# Altium PCB DPT2.4.PcbDoc
Units mm, origin at the board's own origin, x right, y up, seen from the top; angles counter-clockwise.
Board outline 75 x 75 mm, 4 copper layers (Top Layer, Layer 1, Layer 2, Bottom Layer), stack 1.491 mm thick; 152 components, 40 nets, 321 pads, 351 vias.
Unrouted connection lines stored in the file: 86.
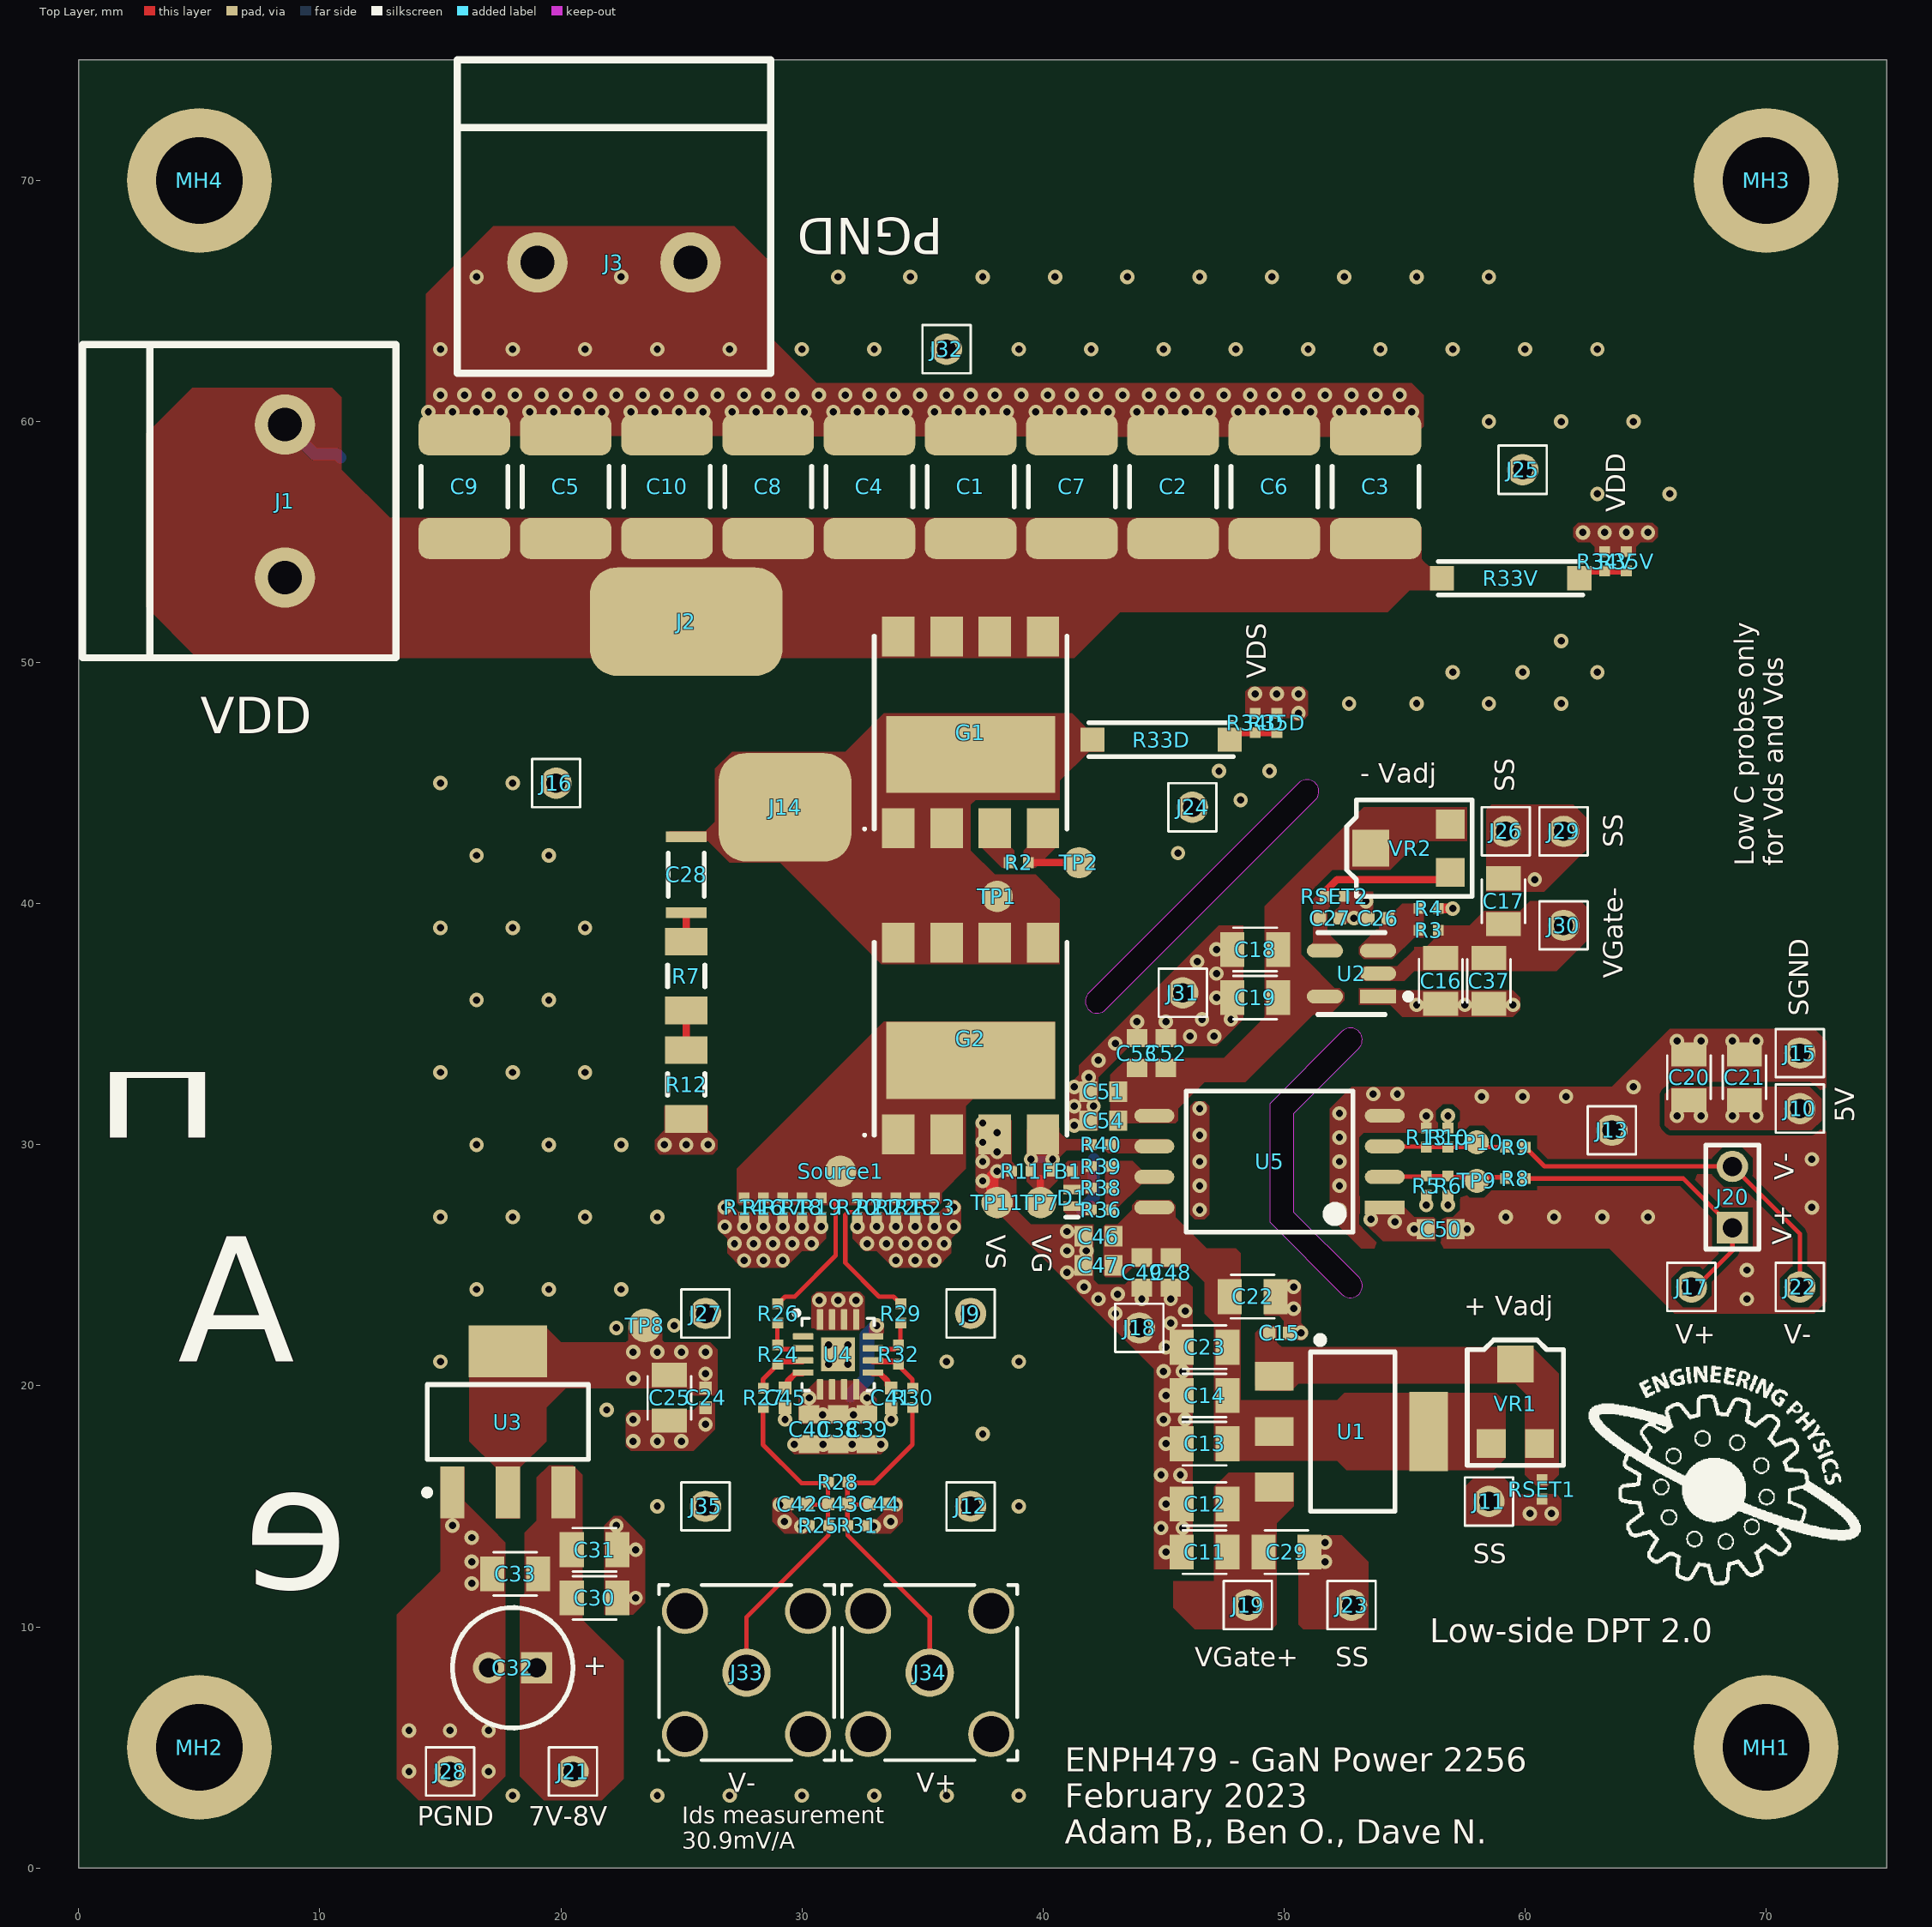
[diagram p0: Top Layer view]
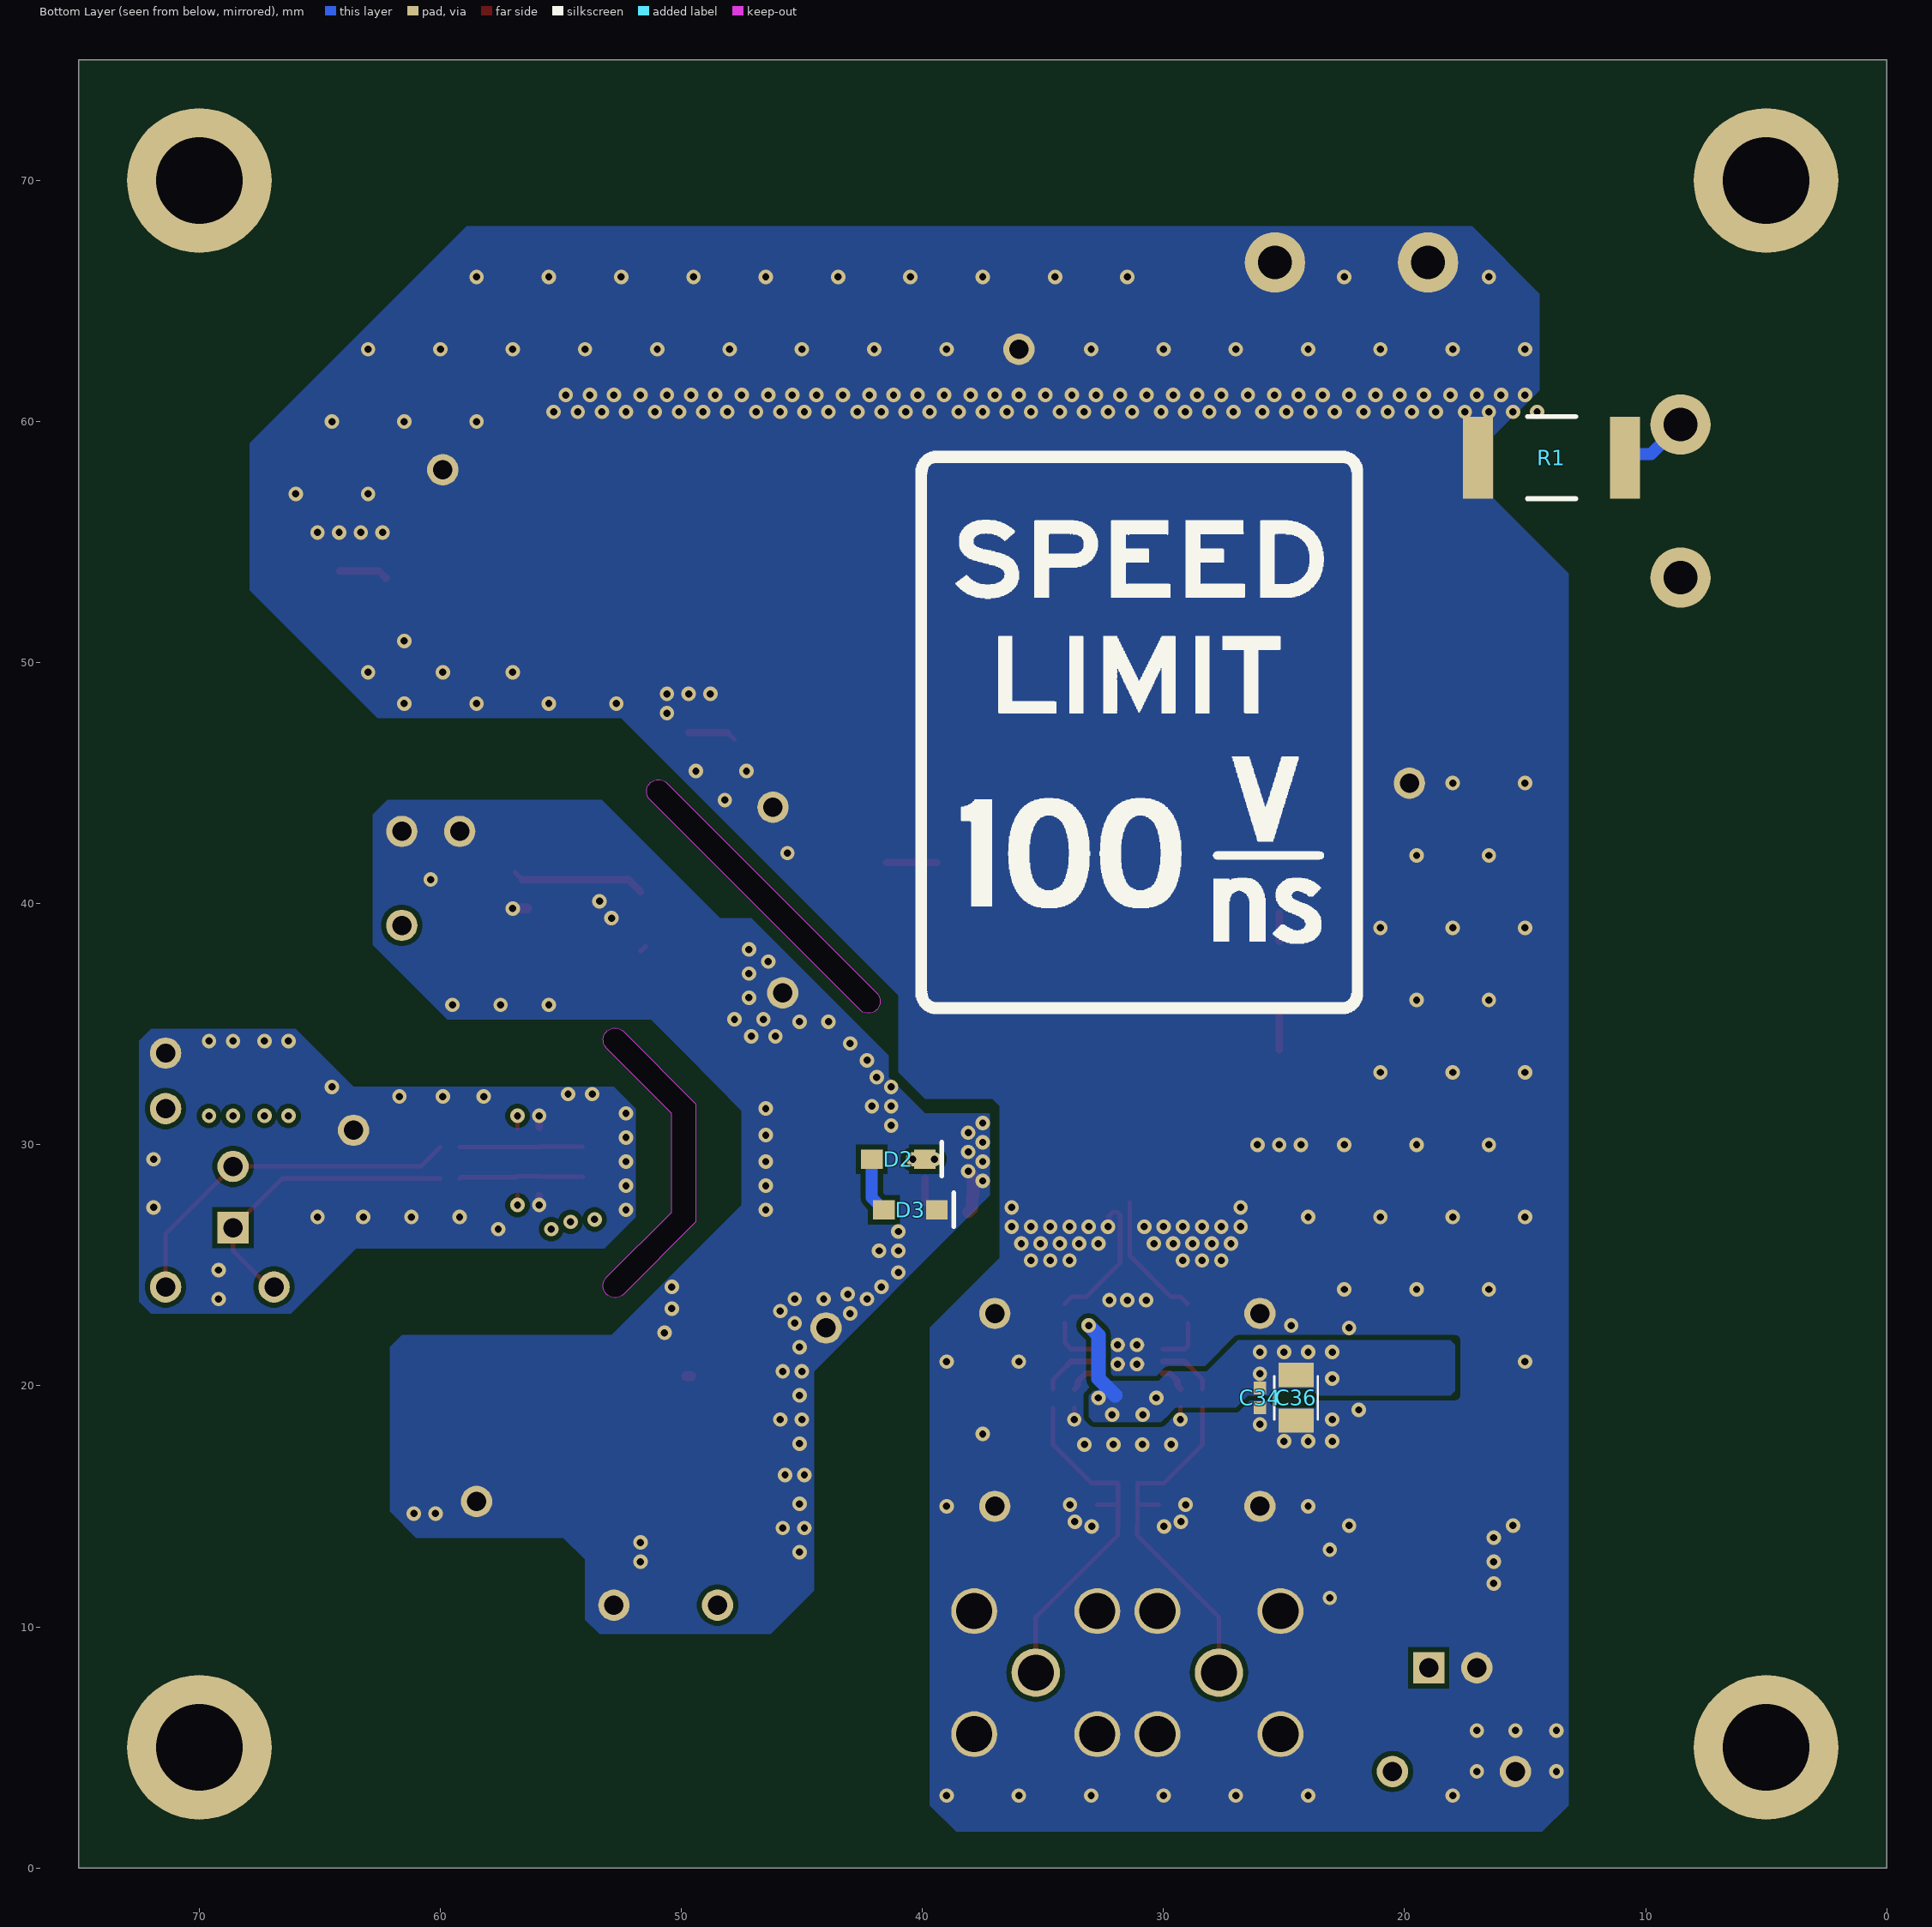
[diagram p1: Bottom Layer view, seen from below]
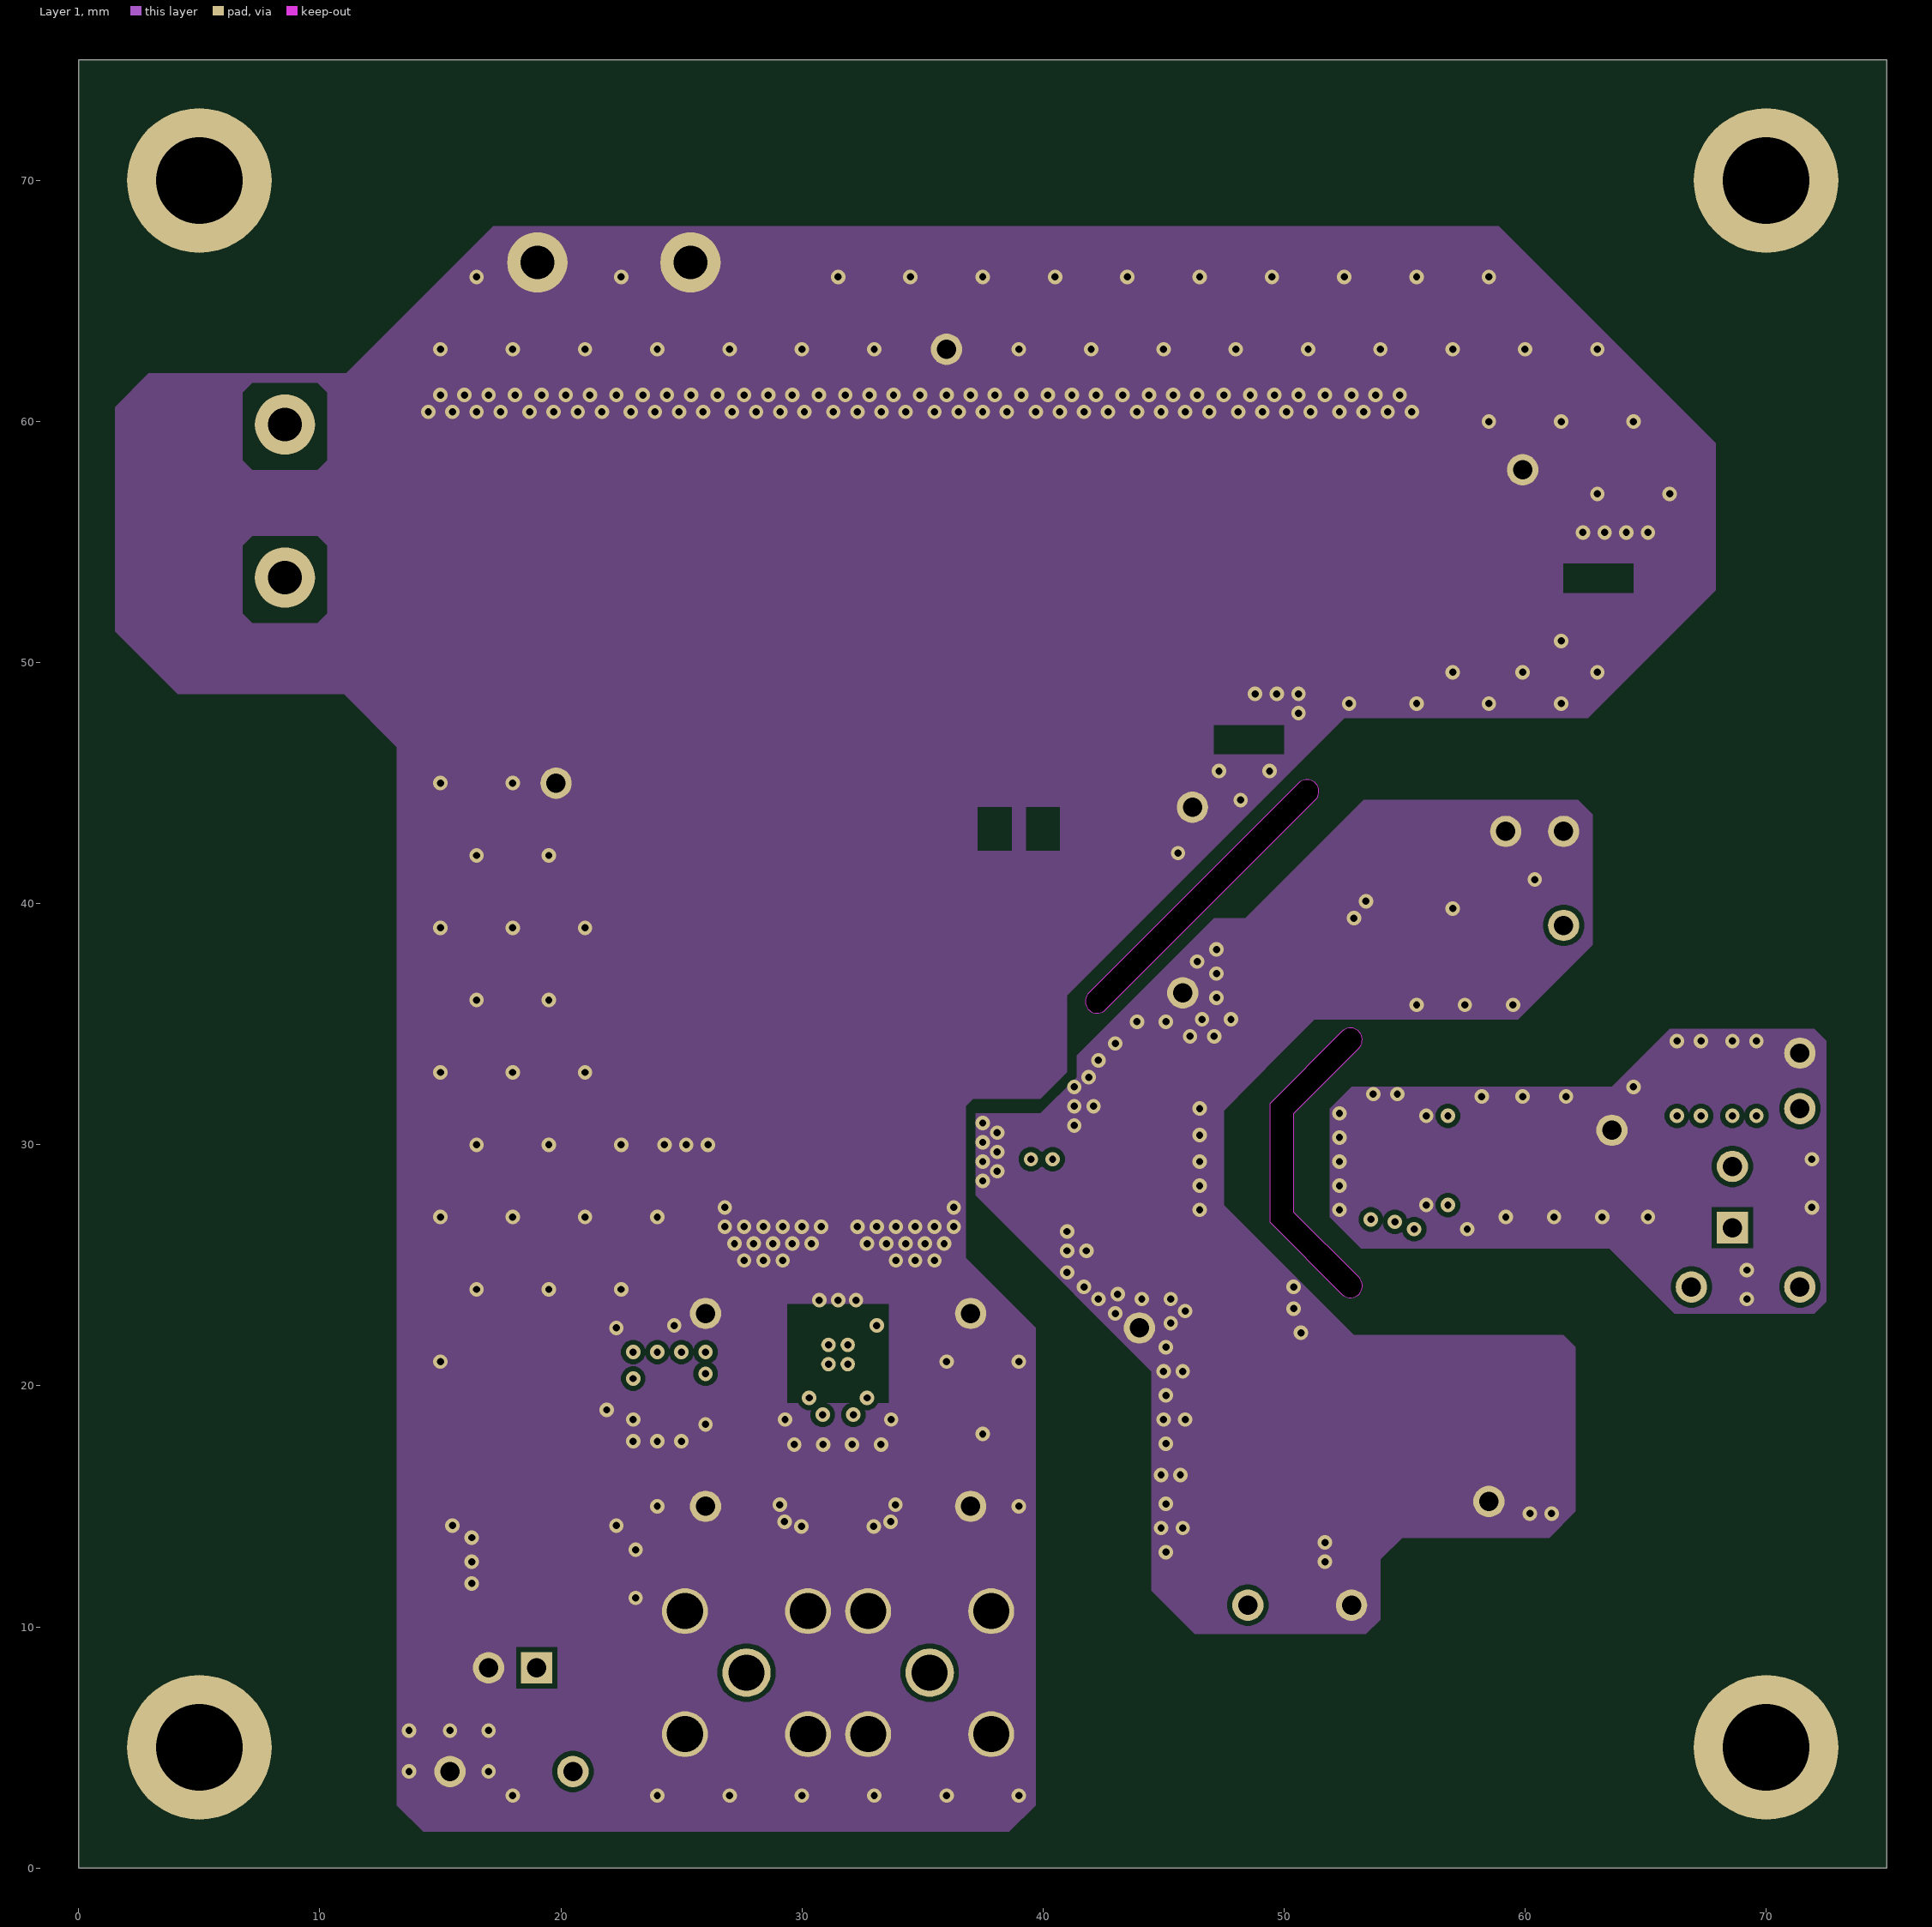
[diagram p2: Layer 1]
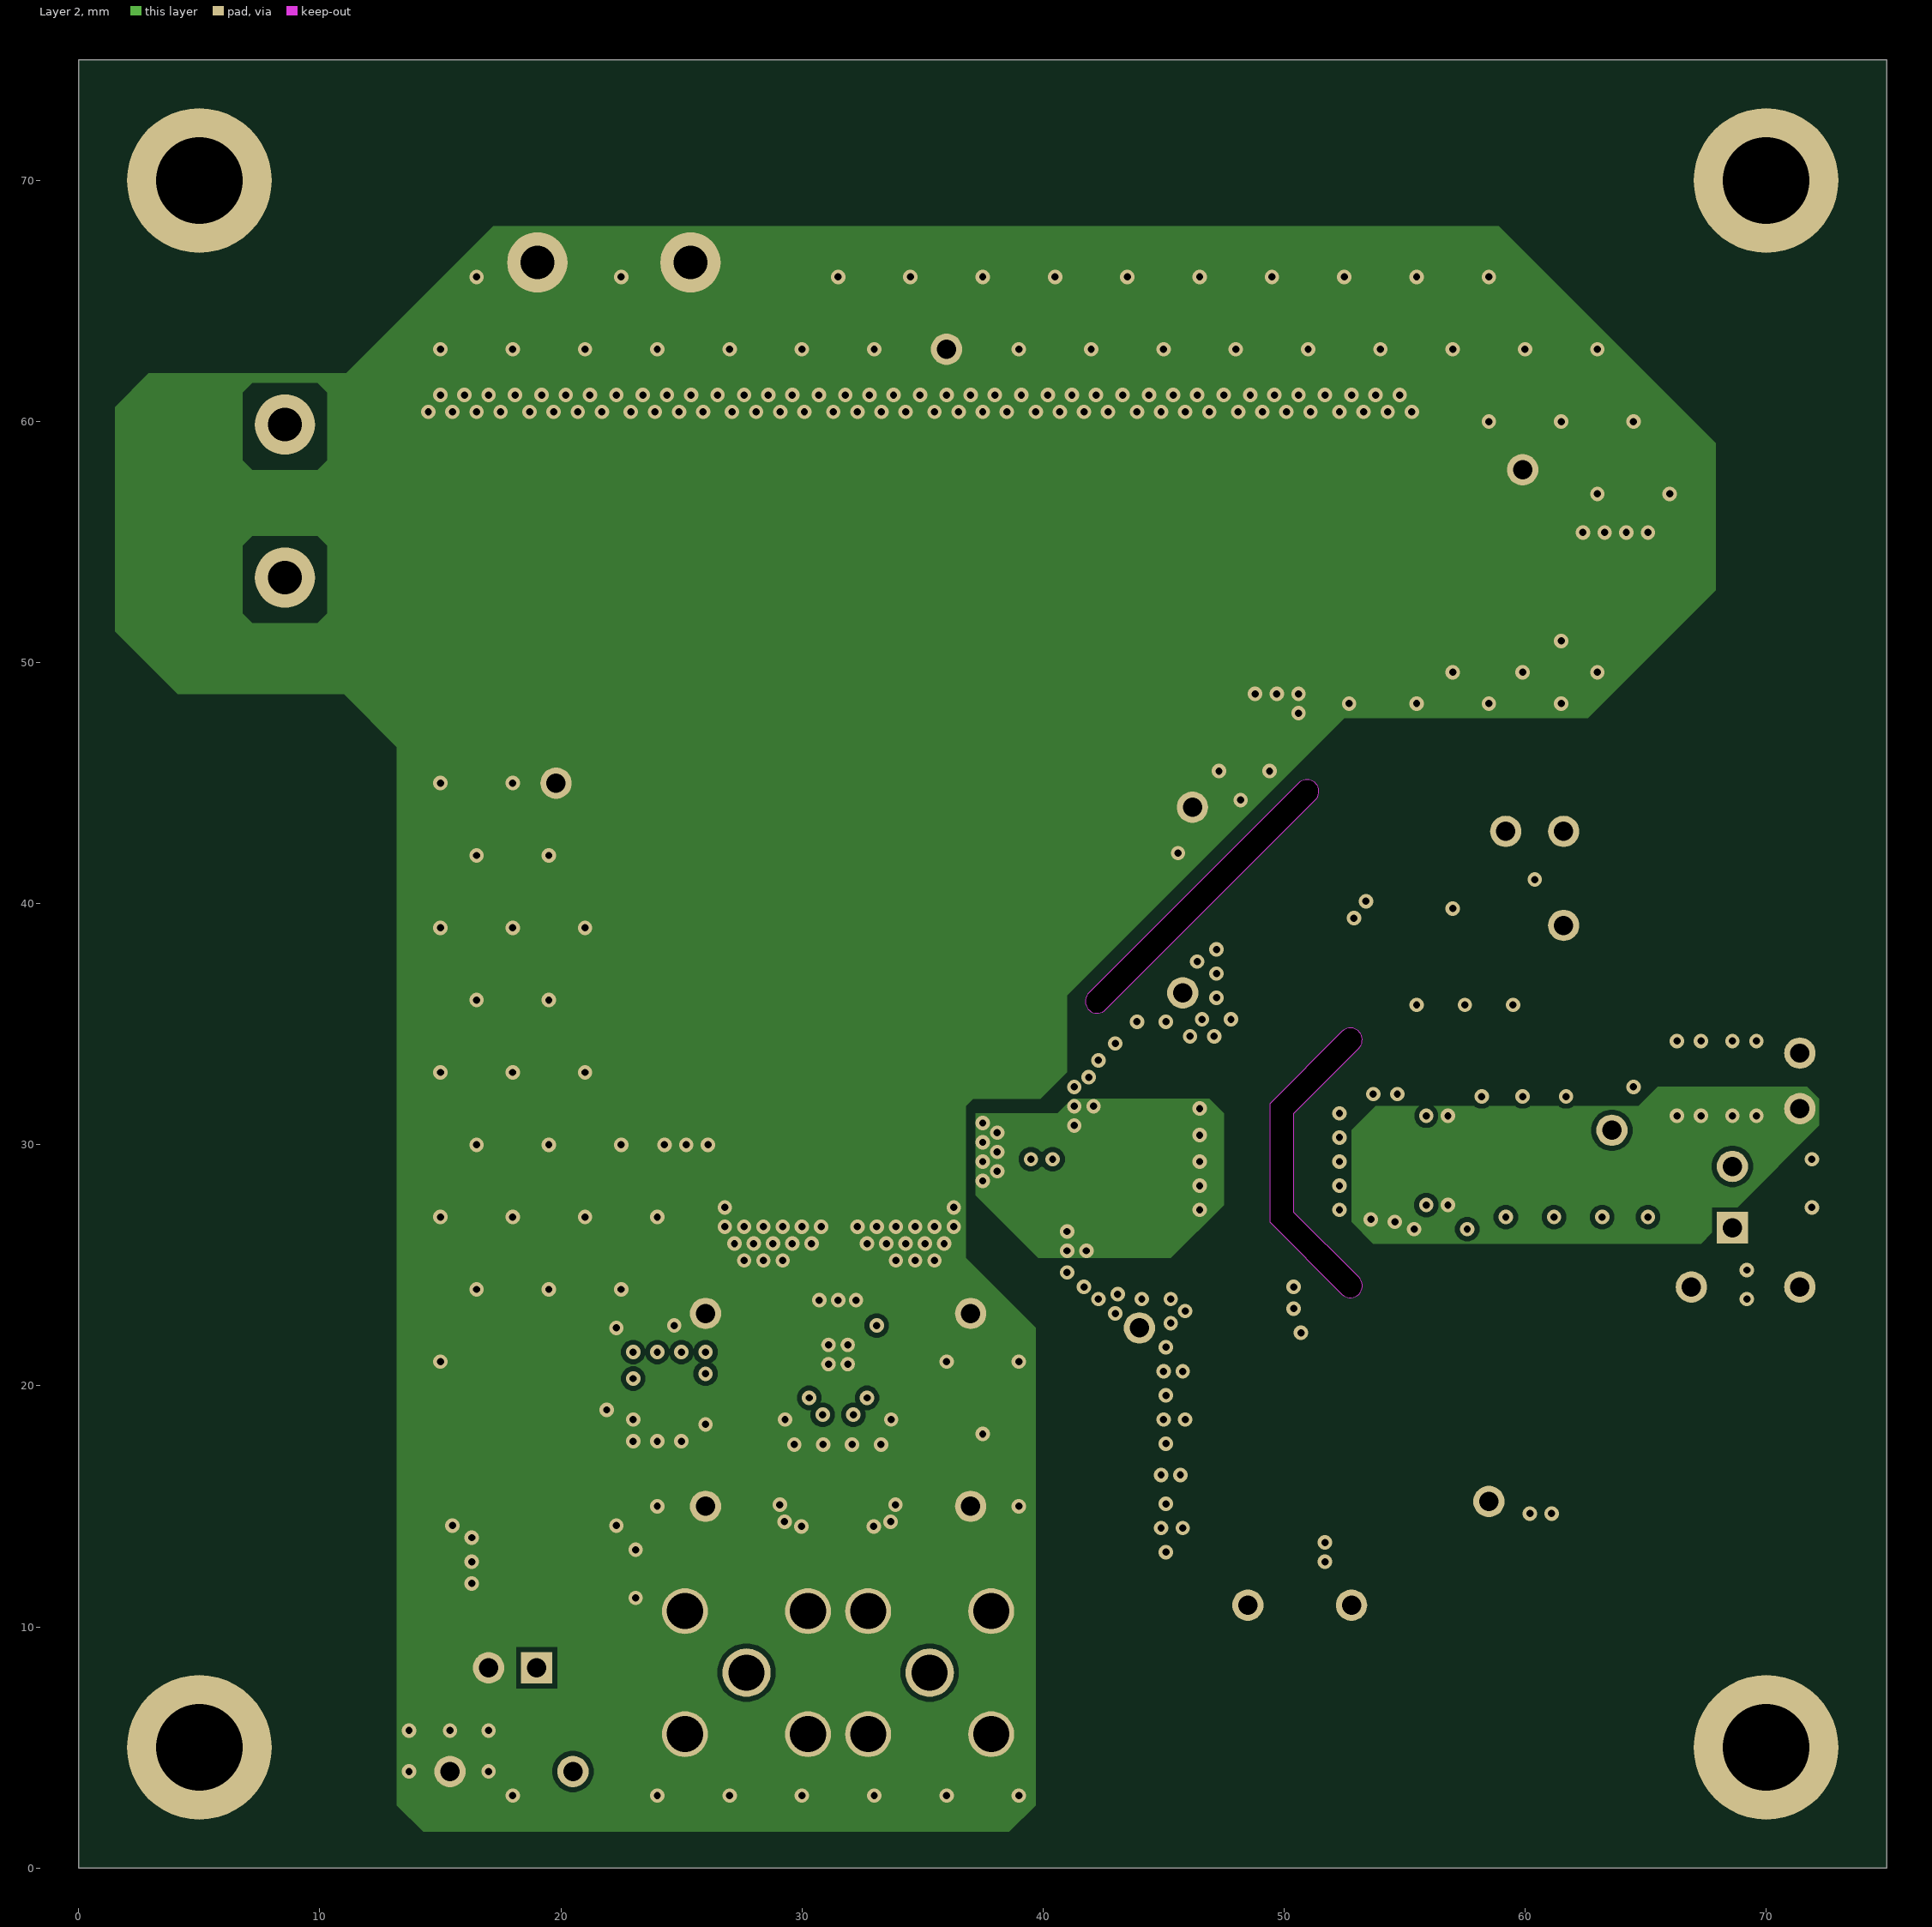
[diagram p3: Layer 2]
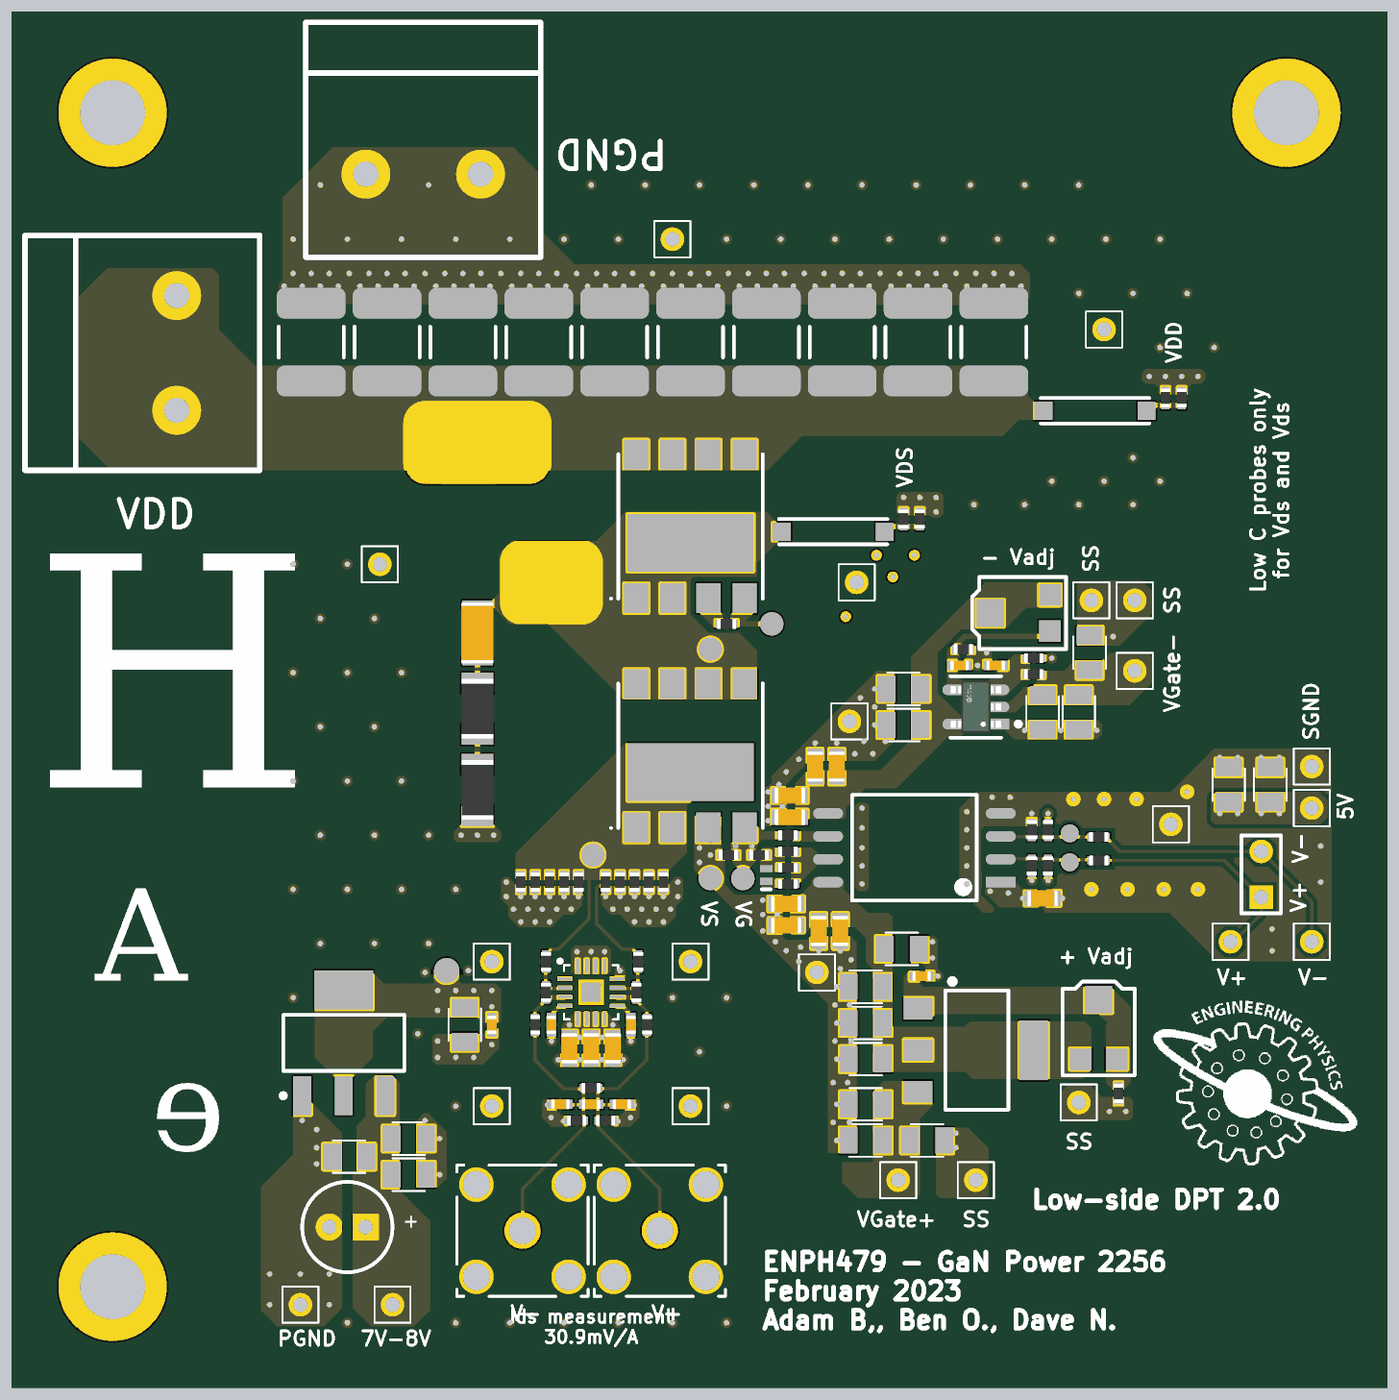
[diagram p4: 3D render of the assembled board from above, using the file's embedded part models]

## Layer stack, top to bottom
Top Solder: solder mask 0.0102, Solder Resist, Dk 3.5
Top Layer: signal copper 0.0356
Dielectric 2: prepreg 0.11, PP-006, Dk 4.1
Layer 1: signal copper 0.035
Dielectric 1: dielectric 1.13, FR-4, Dk 4.8
Layer 2: signal copper 0.035
Dielectric 3: prepreg 0.11, PP-006, Dk 4.1
Bottom Layer: signal copper 0.0356
Bottom Solder: solder mask 0.0102, Solder Resist, Dk 3.5

## Board outline
0,0 0,75 75,75 75,0
cut-out: 53.1,34 ccw(c52.75,34.35) 52.4,34.7 49.4,31.7 49.4,26.8 52.4,23.8 ccw(c52.75,24.15) 53.1,24.5 50.4,27.2 50.4,31.3
cut-out: 41.9,36.3 ccw(c42.25,35.95) 42.6,35.6 51.3,44.3 ccw(c50.95,44.65) 50.6,45

## Design rules (kind name [scope] priority, off if disabled: settings)
Clearance [All] p1: gap=0.2 ignorepadtopadclearanceinfootprint=TRUE
ComponentClearance [All] p1: gap=0.2 collisioncheckmode=3 verticalgap=0.254 showdistances=FALSE
DiffPairsRouting [All] p1: maxlimit=0.4 minlimit=0.2 mostfreqgap=0.254 toplayer_minwidth=0.15 toplayer_maxwidth=0.381 toplayer_prefwidth=0.381 midlayer1_minwidth=0.15 midlayer1_maxwidth=0.381 midlayer1_prefwidth=0.381 midlayer2_minwidth=0.15 midlayer2_maxwidth=0.381 midlayer2_prefwidth=0.381 bottomlayer_minwidth=0.15 bottomlayer_maxwidth=0.381 bottomlayer_prefwidth=0.381 maxuncoupledlength=12.7
HoleSize [All] p1: absolutevalues=TRUE maxlimit=6 minlimit=0.3 maxpercent=80.000 minpercent=20.000
HoleToHoleClearance [All] p1: gap=0.41 allowstackedmicrovias=TRUE
MatchedLengths [InDifferentialPairClass('All Differential Pairs')] p1: tolerance=2.54 checknetsindiffpair=TRUE checkdiffpairvsdiffpair=FALSE checkxsignals=FALSE checkothers=FALSE
MinimumAnnularRing [All] p1: minimumring=0.15
MinimumSolderMaskSliver [All] p1: minsoldermaskwidth=0.051
PlaneConnect [All] p1: planeconnectstyle=Direct reliefexpansion=0.508 reliefentries=4 reliefconductorwidth=0.254 reliefairgap=0.254
PolygonConnect [All] p1: connectstyle=Direct reliefconductorwidth=0.254 reliefentries=4 polygonreliefangle="90 Angle" airgapwidth=0.254
RoutingVias [All] p1: holewidth=0.3 width=0.5 viastyle="Through Hole" minholewidth=0.3 minwidth=0.5 maxholewidth=6 maxwidth=1.27
SilkToSolderMaskClearance [IsPad] p1: minsilkscreentomaskgap=0.1 clearancetoexposedcopper=TRUE
SolderMaskExpansion [All] p1: expansion=0.102 istentingtop=FALSE
UnRoutedNet [All] p1: checkbadconnections=TRUE
Width [All] p1: maxlimit=10 minlimit=0.15 preferedwidth=0.185
22 further rules are at their usual default settings.

## Classes and differential pairs
component class LD: C46 C47 C48 C49 C50 C51 C52 C53 C54 D1 D2 D3 FB1 R36 R38 R39 R40 U5
channel class HV_Measurements: D V
component class V: R33V R34V R35V
component class D: R33D R34D R35D
component class DPT2.0: *1 *2 C1 C2 C3 C4 C5 C6 C7 C8 C9 C10 C11 C12 C13 C14 C15 C16 C17 C18 C19 C20 C21 C22 C23 C24 C25 C26 C27 C28 C29 C30 C31 C32 C33 C34 C36 C37 C38 C39 C40 C41 C42 C43 C44 C45 G1 G2 J1 J2 J3 J9 J10 J11 J12 J13 J14 J15 J16 J17 J18 J19 J20 J21 J22 J23 J24 J25 J26 J27 J28 J29 J30 J31 J32 J33 J34 J35 MH1 MH2 MH3 MH4 R1 R2 R3 R4 R5 R6 R7 R8 R9 R10 R11 R12 R13 R14 R15 R16 R17 R18 R19 R20 R21 R22 R23 R24 R25 R26 R27 R28 R29 R30 R31 R32 RSET1 RSET2 Source1 TP1 TP2 TP7 TP8 TP9 TP10 TP11 U1 U2 U3 U4 VR1 VR2

## Components (designator, comment, footprint, x,y, rotation, side; value= is the part's Value field where it differs from the comment)
C1 "CAP-1812" CAP_1812 37,57.3 r90 top value=0.1u
C2 "CAP-1812" CAP_1812 45.4,57.3 r90 top value=0.1u
C3 "CAP-1812" CAP_1812 53.8,57.3 r90 top value=0.1u
C4 "CAP-1812" CAP_1812 32.8,57.3 r90 top value=0.1u
C5 "CAP-1812" CAP_1812 20.2,57.3 r90 top value=0.1u
C6 "CAP-1812" CAP_1812 49.6,57.3 r90 top value=0.1u
C7 "CAP-1812" CAP_1812 41.2,57.3 r90 top value=0.1u
C8 "CAP-1812" CAP_1812 28.6,57.3 r90 top value=0.1u
C9 "CAP-1812" CAP_1812 16,57.3 r90 top value=0.1u
C10 "CAP-1812" CAP_1812 24.4,57.3 r90 top value=0.1u
C11 "CAP-0805" CAP_0805_MED 46.7,13.1 r180 top value=1u
C12 "CAP-0805" CAP_0805_MED 46.7,15.1 r180 top value=1u
C13 "CAP-0805" CAP_0805_MED 46.7,17.6 r180 top value=1u
C14 "CAP-0805" CAP_0805_MED 46.7,19.6 r180 top value=1u
C15 "CAP-0402" CAP_0402_HIGH 49.8,22.2 r0 top value=0.1u
C16 "CAP-0805" CAP_0805_MED 56.5,36.8 r270 top value=1u
C17 "CAP-0805" CAP_0805_MED 59.1,40.1 r90 top value=1u
C18 "CAP-0805" CAP_0805_MED 48.8,38.1 r180 top value=1u
C19 "CAP-0805" CAP_0805_MED 48.8,36.1 r180 top value=1u
C20 "CAP-0805" CAP_0805_MED 66.8,32.8 r90 top value=1u
C21 "CAP-0805" CAP_0805_MED 69.1,32.8 r90 top value=1u
C22 "CAP-0805" CAP_0805_MED 48.7,23.7 r0 top value=1u
C23 "CAP-0805" CAP_0805_MED 46.7,21.6 r180 top value=1u
C24 "CAP-0402" CAP_0402_HIGH 26,19.5 r90 top value=0.1u
C25 "CAP-0805" CAP_0805_MED 24.5,19.5 r90 top value=1u
C26 "CAP-0402" CAP_0402_HIGH 53.9,39.4 r180 top value=0.1u
C27 "CAP-0402" CAP_0402_HIGH 51.9,39.4 r0 top value=0.1u
C28 "CAP-1206-HV" CAP_1206_HV 25.2,41.2 r270 top value=10p
C29 "CAP-0805" CAP_0805_MED 50.1,13.1 r0 top value=1u
C30 "CAP-0805" CAP_0805_MED 21.4,11.2 r0 top value=1u
C31 "CAP-0805" CAP_0805_MED 21.4,13.2 r0 top value=1u
C32 "PCAP-2MMx5MM" PCAP_2MM_5MM 18,8.3 r180 top value=100u
C33 "CAP-0805" CAP_0805_MED 18.1,12.2 r0 top value=1u
C34 "CAP-0402" CAP_0402_HIGH 26,19.5 r90 bottom value=0.1u
C36 "CAP-0805" CAP_0805_MED 24.5,19.5 r90 bottom value=1u
C37 "CAP-0805" CAP_0805_MED 58.5,36.8 r90 top value=1u
C38 "CAP-0603" CAP_0603_HIGH 31.5,18.2 r90 top value=0.1u
C39 "CAP-0603" CAP_0603_HIGH 32.7,18.2 r90 top value=1u
C40 "CAP-0603" CAP_0603_HIGH 30.3,18.2 r90 top value=1u
C41 "CAP-0402" CAP_0402_HIGH 33.7,19.5 r90 top value=0.1u
C42 "CAP-0402" CAP_0402_HIGH 29.8,15.1 r0 top value=1p
C43 "CAP-0402" CAP_0402_HIGH 31.5,15.1 r0 top value=3p
C44 "CAP-0402" CAP_0402_HIGH 33.2,15.1 r0 top value=1p
C45 "CAP-0402" CAP_0402_HIGH 29.3,19.5 r90 top value=0.1u
C46 "CAP-0603" CAP_0603_HIGH 42.3,26.2 r0 top value=1u
C47 "CAP-0603" CAP_0603_HIGH 42.3,25 r0 top value=1u
C48 "CAP-0603" CAP_0603_HIGH 45.3,24.7 r90 top value=1u
C49 "CAP-0603" CAP_0603_HIGH 44.1,24.7 r90 top value=1u
C50 "CAP-0603" CAP_0603_HIGH 56.5,26.5 r0 top value=1u
C51 "CAP-0603" CAP_0603_HIGH 42.5,32.2 r180 top value=1u
C52 "CAP-0603" CAP_0603_HIGH 45.1,33.8 r90 top value=1u
C53 "CAP-0603" CAP_0603_HIGH 43.9,33.8 r90 top value=1u
C54 "CAP-0603" CAP_0603_HIGH 42.5,31 r180 top value=1u
D1 "CDBQC0130L-HF" DIO_SOD-923F 41.2,27.8 r90 top
D2 "DIO_323F_ZENER" DIO_SOD-323F 41,29.4 r0 bottom value=6.2V
D3 "DIO_323F_ZENER" DIO_SOD-323F 40.5,27.3 r0 bottom value=6.2V
FB1 "RES-0402" RES_0402_HIGH 40.8,28.9 r180 top value=1k
G1 "GPI65030DFN" DFN_8X8 37,47.1 r90 top
G2 "GPI65030DFN" DFN_8X8 37,34.4 r90 top
J1 "TERM_1X2" J_TERM_BLK_1X2 8.55,56.7 r270 top
J2 "CONN_PAD" CONN_PAD#1 25.2,51.7 r0 top
J3 "TERM_1X2" J_TERM_BLK_1X2 22.2,66.6 r180 top
J9 "PIN_M" J_THT_1_PIN 37,23 r270 top
J10 "PIN_M" J_THT_1_PIN 71.4,31.5 r180 top
J11 "PIN_M" J_THT_1_PIN 58.5,15.2 r0 top
J12 "PIN_M" J_THT_1_PIN 37,15 r0 top
J13 "PIN_M" J_THT_1_PIN 63.6,30.6 r270 top
J14 "CONN_PAD" CONN_PAD#2 29.3,44 r180 top
J15 "PIN_M" J_THT_1_PIN 71.4,33.8 r180 top
J16 "PIN_M" J_THT_1_PIN 19.8,45 r0 top
J17 "PIN_M" J_THT_1_PIN 66.9,24.1 r0 top
J18 "PIN_M" J_THT_1_PIN 44,22.4 r180 top
J19 "PIN_M" J_THT_1_PIN 48.5,10.9 r90 top
J20 "PIN_M_1X2" J_THT_2.54MM_1X2 68.6,29.1 r90 top
J21 "PIN_M" J_THT_1_PIN 20.5,4 r0 top
J22 "PIN_M" J_THT_1_PIN 71.4,24.1 r0 top
J23 "PIN_M" J_THT_1_PIN 52.8,10.9 r90 top
J24 "PIN_M" J_THT_1_PIN 46.2,44 r0 top
J25 "PIN_M" J_THT_1_PIN 59.9,58 r0 top
J26 "PIN_M" J_THT_1_PIN 59.2,43 r0 top
J27 "PIN_M" J_THT_1_PIN 26,23 r0 top
J28 "PIN_M" J_THT_1_PIN 15.4,4 r180 top
J29 "PIN_M" J_THT_1_PIN 61.6,43 r270 top
J30 "PIN_M" J_THT_1_PIN 61.6,39.1 r270 top
J31 "PIN_M" J_THT_1_PIN 45.8,36.3 r0 top
J32 "PIN_M" J_THT_1_PIN 36,63 r0 top
J33 "SMA_VERT_F" SMA_VERT_F 27.7,8.1 r0 top
J34 "SMA_VERT_F" SMA_VERT_F 35.3,8.1 r0 top
J35 "PIN_M" J_THT_1_PIN 26,15 r0 top
MH1 "Mounting Hole" "Mounting Hole-Footprint-1"#1 80.9,25.5 r0 top
MH2 "Mounting Hole" "Mounting Hole-Footprint-1"#2 5,5 r0 top
MH3 "Mounting Hole" "Mounting Hole-Footprint-1"#3 71.4,70.5 r0 top
MH4 "Mounting Hole" "Mounting Hole-Footprint-1"#4 6.1,70.8 r0 top
R1 "RES-2512" RES_2512_MED 13.9,58.5 r0 bottom value=1M
R2 "RES-0402" RES_0402_HIGH 39,41.7 r0 top value=10
R3 "RES-0402" RES_0402_HIGH 56,38.9 r0 top value=1k
R4 "RES-0402" RES_0402_HIGH 56,39.8 r0 top value=1k
R5 "RES-0402" RES_0402_HIGH 55.9,28.3 r90 top value=100
R6 "RES-0402" RES_0402_HIGH 56.8,28.3 r270 top value=100
R7 "RES-1206" RES_1206_MED 25.2,37 r270 top value=1k
R8 "RES-0402" RES_0402_HIGH 59.6,28.6 r180 top value=0
R9 "RES-0402" RES_0402_HIGH 59.6,29.9 r180 top value=0
R10 "RES-0402" RES_0402_HIGH 56.8,30.3 r90 top value=100
R11 "RES-0402" RES_0402_HIGH 39.1,28.9 r0 top value=10
R12 "RES-1206" RES_1206_MED 25.2,32.5 r270 top value=1k
R13 "RES-0402" RES_0402_HIGH 55.9,30.3 r270 top value=100
R14 "RES-0402" RES_0402_HIGH 27.6,27.4 r90 top value=0.1
R15 "RES-0402" RES_0402_HIGH 34.7,27.4 r90 top value=0.1
R16 "RES-0402" RES_0402_HIGH 28.4,27.4 r90 top value=0.1
R17 "RES-0402" RES_0402_HIGH 29.2,27.4 r90 top value=0.1
R18 "RES-0402" RES_0402_HIGH 30,27.4 r90 top value=0.1
R19 "RES-0402" RES_0402_HIGH 30.8,27.4 r90 top value=0.1
R20 "RES-0402" RES_0402_HIGH 32.3,27.4 r90 top value=0.1
R21 "RES-0402" RES_0402_HIGH 33.1,27.4 r90 top value=0.1
R22 "RES-0402" RES_0402_HIGH 33.9,27.4 r90 top value=0.1
R23 "RES-0402" RES_0402_HIGH 35.5,27.4 r90 top value=0.1
R24 "RES-0402" RES_0402_HIGH 29,21.3 r90 top value=680
R25 "RES-0402" RES_0402_HIGH 30.7,14.2 r0 top value=50
R26 "RES-0402" RES_0402_HIGH 29,23 r90 top value=220
R27 "RES-0402" RES_0402_HIGH 28.4,19.5 r90 top value=50
R28 "RES-0402" RES_0402_HIGH 31.5,16 r180 top value=50
R29 "RES-0402" RES_0402_HIGH 34.1,23 r90 top value=220
R30 "RES-0402" RES_0402_HIGH 34.6,19.5 r90 top value=50
R31 "RES-0402" RES_0402_HIGH 32.3,14.2 r180 top value=50
R32 "RES-0402" RES_0402_HIGH 34,21.3 r90 top value=680
R33D "RES-2512-SIDE" RES_2512_SIDE 44.9,46.8 r0 top (schematic designator R33)
R33V "RES-2512-SIDE" RES_2512_SIDE 59.4,53.5 r0 top (schematic designator R33)
R34D "RES-0402" RES_0402_HIGH 48.8,47.5 r270 top value=1k (schematic designator R34)
R34V "RES-0402" RES_0402_HIGH 63.3,54.2 r270 top value=1k (schematic designator R34)
R35D "RES-0402" RES_0402_HIGH 49.7,47.5 r270 top value=1k (schematic designator R35)
R35V "RES-0402" RES_0402_HIGH 64.2,54.2 r270 top value=1k (schematic designator R35)
R36 "RES-0402" RES_0402_HIGH 42.4,27.3 r180 top value=0
R38 "RES-0402" RES_0402_HIGH 42.4,28.2 r180 top value=33
R39 "RES-0402" RES_0402_HIGH 42.4,29.1 r180 top value=20
R40 "RES-0402" RES_0402_HIGH 42.4,30 r180 top value=0
RSET1 "RES-0402" RES_0402_HIGH 60.7,15.7 r90 top value=1k
RSET2 "RES-0402" RES_0402_HIGH 52.1,40.3 r0 top value=1k
Source1 "Testpoint" Testpoint-Footprint-1#1 31.6,28.9 r90 top
TP1 "Testpoint" Testpoint-Footprint-1#1 38.1,40.3 r90 top
TP2 "Testpoint" Testpoint-Footprint-1#1 41.5,41.7 r90 top
TP7 "Testpoint" Testpoint-Footprint-1#1 39.9,27.6 r90 top
TP8 "Testpoint" Testpoint-Footprint-1#2 23.5,22.5 r90 top
TP9 "Testpoint" Testpoint-Footprint-1#3 58,28.5 r90 top
TP10 "Testpoint" Testpoint-Footprint-1#3 58,30.1 r90 top
TP11 "Testpoint" Testpoint-Footprint-1#1 38.1,27.6 r90 top
U1 "AZ1117H-ADJTRE1" SOT-223 52.8,18.1 r270 top
U2 "MAX1735EUK50+T" FP-U5-2-IPC_B 52.8,37.1 r180 top
U3 "AZ1117IH-5.0TRG1" SOT230P700X180-4N 17.8,18.5 r90 top
U4 "THS4508RGTT" QFN-16 31.5,21.3 r0 top
U5 "ADUM4121ARIZ-RL" SOIC-8_WIDE 49.4,29.3 r180 top
VR1 "RES_POT_JLEAD" TRIM_J-LEAD 59.6,19.4 r0 top value=500
VR2 "RES_POT_JLEAD" TRIM_J-LEAD 55.1,42.3 r90 top value=5k

## Footprints (in the part's own frame and the unit in brackets; to place one, negate y for a bottom-side part, rotate by r counter-clockwise, add the part's x,y. Pads: shape width x height; smd on the part's side, far side on the other; paste and mask are expansions set on the pad)
CAP_0402_HIGH [mm] "SMD Capacitor 0402 (1005 Metric) - High Density"
  rect 0.52x0.52 smd: 1(-0.41,0) 2(0.41,0)
  body extent -0.53,-0.28 0.53,0.28, height 0.55
CAP_0603_HIGH [mm] "SMD Capacitor 0603 (1608 Metric) - High Density"
  rect 0.75x0.85 smd: 1(-0.625,0) 2(0.625,0)
  body extent -0.85,-0.45 0.85,0.45, height 0.9
CAP_0805_MED [mm] "SMD Capacitor 0805 (2013 Metric) - Medium Density"
  rect 1x1.45 smd: 1(-0.95,0) 2(0.95,0)
  silkscreen extent -0.9,-0.9 0.9,0.9, body extent -1.35,-0.8 1.35,0.8, height 0.25
CAP_1206_HV [mm] "SMD Capacitor 1206 (3216 Metric) - High Voltage"
  rect 0.45x1.7 smd: 1(-1.575,0) 2(1.575,0)
  silkscreen extent -0.9,-0.75 0.9,0.75, body extent -1.7,-0.9 1.7,0.9, height 1.8
CAP_1812 [mm] "Non Polarized SMD Capacitor 1812 (4532 Metric)"
  rrect50% 1.7x3.8 smd paste+0 mask+0: 1(-2.15,0) 2(2.15,0)
  silkscreen extent -0.85,-1.8 0.85,1.8, body extent -2.25,-1.7 2.25,1.7, height 0.6
CONN_PAD#1 [mm] "Generic Exposed Pad for connecting a Load (30A out)"
  rrect50% 8x4.5 smd paste-2.25: 1(0,0)
CONN_PAD#2 [mm] "Generic Exposed Pad for connecting a Load (30A out)"
  rrect50% 5.5x4.5 smd paste-2.25: 1(0,0)
DFN_8X8 [mm] "DFN, 4-Leads, Body 8.00x8.00mm, Pitch 7.95mm, IPC Medium Density"
  rect 1.65x1.35 smd: 1(-3.975,3) 2(-3.975,1) 3(-3.975,-1) 4(-3.975,-3) 5(3.975,-3) 6(3.975,-1) 7(3.975,1) 8(3.975,3)
  rect 3.2x7 smd: 9(-0.91,0)
  silkscreen extent -4.05,-4 4,4.45, body extent -4,-4 4,4, height 0.45
DIO_SOD-323F [mm] "SOD-323F Small outline diode"
  rect 0.9x0.8 smd paste+0 mask+0: 1(-1.1,0) 2(1.1,0)
  silkscreen extent -1.8,-0.7 -1.8,0.7, body extent -1.1,-0.9 1.1,0.9, height 0.25
DIO_SOD-923F [mil] "SOD-923F Small outline diode"
  rect 15.5x28 smd paste+0 mask+0: 1(-13.75,0) 2(13.75,0)
  silkscreen extent -31,-10 -31,10, body extent -20,-12 20,12, height 10
FP-U5-2-IPC_B [mm]
  rect 1.505x0.576 smd paste+0 mask+0: 1(-1.1,0.95)
  rrect100% 1.505x0.576 smd paste+0 mask+0: 2(-1.1,0) 3(-1.1,-0.95) 4(1.1,-0.95) 5(1.1,0.95)
  silkscreen extent -2.48,-1.7 1.4,1.7, body extent -2.1,-1.7 2.1,1.7, height 0.25
J_TERM_BLK_1X2 [mm] "PCB 1X2 Terminal block"
  round 2.5 hole 1.4: 1(-3.175,0) 2(3.175,0)
  silkscreen extent -6.5,-8.4 6.5,4.6, body extent -6.4,-8.3 6.4,4.5, height 21
J_THT_1_PIN [mm] "M/F Pin Header 1 Pin"
  round 1.3 hole 0.8 paste-1000 mask+0: 1(0,0)
  silkscreen extent -1,-1 1,1, body extent -1.02,-1 1.02,1, height 0.25
J_THT_2.54MM_1X2 [mm] "M/F Pin Header 2.54mm pitch, 1X2"
  rect 1.3x1.3 hole 0.8 paste-1000 mask+0: 1(-2.54,0)
  round 1.3 hole 0.8 paste-1000 mask+0: 2(0,0)
  silkscreen extent -3.43,-1.1 0.89,1.1, body extent -3.43,-1.2 1.02,1.2, height 0.25
"Mounting Hole-Footprint-1"#1 [mm]
  round 6 hole 3.6: 1(-10.9,-20.5)
"Mounting Hole-Footprint-1"#2 [mm]
  round 6 hole 3.6: 1(0,0)
"Mounting Hole-Footprint-1"#3 [mm]
  round 6 hole 3.6: 1(-1.4,-0.5)
"Mounting Hole-Footprint-1"#4 [mm]
  round 6 hole 3.6: 1(-1.1,-0.8)
PCAP_2MM_5MM [mm] "Polarized Capacitor THT - 2-Leads, Dia 5mm, Pin Spacing 2mm"
  rect 1.3x1.3 hole 0.8: 1(-1,0)
  round 1.3 hole 0.8: 2(1,0)
  silkscreen extent -2.5,-2.5 2.5,2.5, body extent -2.5,-2.5 2.45,2.5, height 12
QFN-16 [mm] "QFN-16  3mmX3mm"
  rrect25% 0.86x0.26 smd paste-0.032 mask+0.05: 1(-1.45,0.75) 2(-1.45,0.25) 3(-1.45,-0.25) 4(-1.45,-0.75) 9(1.45,-0.75) 10(1.45,-0.25) 11(1.45,0.25) 12(1.45,0.75)
  rrect25% 0.26x0.86 smd paste-0.032 mask+0.05: 5(-0.75,-1.45) 6(-0.25,-1.45) 7(0.25,-1.45) 8(0.75,-1.45) 13(0.75,1.45) 14(0.25,1.45) 15(-0.25,1.45) 16(-0.75,1.45)
  rect 1.4x1.4 smd paste-2 mask+0.05: 17(0,0)
  round 0.6 hole 0.3 mask+0.102: 18(-0.4,0.4) 19(0.4,0.4) 20(0.4,-0.4) 21(-0.4,-0.4)
  silkscreen extent -1.82,-1.5 1.5,1.82, body extent -1.5,-1.5 1.5,1.5, height 2
RES_0402_HIGH [mm] "SMD Resistor 0402 (1005 Metric) - High Density"
  rect 0.45x0.45 smd: 1(-0.4,0) 2(0.4,0)
  body extent -0.53,-0.28 0.53,0.28, height 0.4
RES_1206_MED [mm] "SMD Resistor 1206 (3216 Metric) - Medium Density"
  rect 1.15x1.75 smd: 1(-1.425,0) 2(1.425,0)
  silkscreen extent -0.45,-0.77 0.45,0.77, body extent -1.65,-0.87 1.65,0.87, height 0.6
RES_2512_MED [mm] "SMD Resistor 2512 (6432 Metric) - Medium Density"
  rect 1.25x3.4 smd: 1(-3.05,0) 2(3.05,0)
  silkscreen extent -1,-1.7 1,1.7, body extent -3.05,-1.7 3.05,1.7, height 0.25
RES_2512_SIDE [mm] "SMD Resistor 2512 (6432 Metric) - On its side"
  rect 1x1 smd: 1(-2.85,0) 2(2.85,0)
  silkscreen extent -3,-0.7 3,0.7, body extent -3.05,-0.7 3.05,0.7, height 0.25
SMA_VERT_F [mil] "SMA Vertical Connector, Female"
  round 79 hole 59: 1(0,0)
  round 75 hole 59.06 mask+0: 2(-100.5,100.5) 3(100.5,100.5) 4(-100.5,-100.5) 5(100.5,-100.5)
  silkscreen extent -143,-143 143,143, body extent 0,0 10,10, height 10
SOIC-8_WIDE [mm] "SOIC-8 Wide body"
  rect 1.655x0.582 smd paste+0 mask+0: 1(-4.781,1.905)
  rrect100% 1.655x0.582 smd paste+0 mask+0: 2(-4.781,0.635) 3(-4.781,-0.635) 4(-4.781,-1.905) 5(4.781,-1.905) 6(4.781,-0.635) 7(4.781,0.635) 8(4.781,1.905)
  silkscreen extent -3.45,-2.93 3.45,2.93, body extent -4.83,-3.18 4.83,3.18, height 0.25
SOT230P700X180-4N [mm] "SOT223, 4-Leads, Body 6.50x7.00mm (avg), Pitch 2.30mm, IPC Medium Density"
  rect 2.15x1 smd: 1(-2.925,2.3) 2(-2.925,0) 3(-2.925,-2.3)
  rect 2.15x3.25 smd: 4(2.925,0)
  silkscreen extent -3.05,-3.35 1.55,3.47, body extent -1.85,-3.35 1.85,3.35, height 1.8
SOT-223 [mm] "SOT-223"
  rect 1.2x1.6 smd: 1(-2.3,-3.2) 2(0,-3.2) 3(2.3,-3.2)
  rect 3.3x1.6 smd: 4(0,3.2)
  silkscreen extent -3.94,-1.7 3.3,1.8, body extent -3.43,-3.3 3.56,3.18, height 0.25
Testpoint-Footprint-1#1 [mm]
  round 1.3 smd: 1(0,0)
Testpoint-Footprint-1#2 [mm]
  round 1.4 smd: 1(0,0)
Testpoint-Footprint-1#3 [mm]
  round 1 smd: 1(0,0)
TRIM_J-LEAD [mm] "3mm SMD J-Lead Trim Pot"
  rect 1.2x1.2 smd: 1(-1,-1.8) 2(1,-1.8)
  rect 1.524x1.524 smd: 3(0,1.5)
  silkscreen extent -2,-2.7 2,2.5, body extent -1.9,-2.6 1.9,1.9, height 5

## Part data
C1 C2 C3 C4 C5 C6 C7 C8 C9 C10: library part CMP-001-00088-2, "Non polarized SMD capacitor - 1812 (4532 Metric)", Package=1812
C11 C12 C13 C14 C16 C17 C18 C19 C20 C21 C22 C23 C25 C29 C30 C31 C33 C36 C37: library part CMP-001-00086-3, "Non polarized SMD capacitor - 0805 (1608 Metric)", Package=0805
C15 C24 C26 C27 C34 C41 C42 C43 C44 C45: library part CMP-001-00083-3, "Non polarized SMD capacitor - 0402 (1005 Metric)", Package=0402
C28: library part CMP-001-00089-1, "Non polarized SMD capacitor - 1206 (3216 Metric) High Voltage", Package=1206, Voltage Rating=1kV
C32: library part CMP-001-00091-1, "Polarized THT capacitor - Radial can, 2mm lead spacing, 5mm diameter"
C38 C39 C40 C46 C47 C48 C49 C50 C51 C52 C53 C54: library part CMP-001-00084-2, "Non polarized SMD capacitor - 0603 (1608 Metric)", Package=0603
D1: library part CMP-004-00031-2, "Low VF SMD Schottky Barrier Diode", Package=SOD-923F
D2 D3: library part CMP-004-00032-1, "Generic SOD-323F Zener diode", Package=SOD-323F
FB1 R2 R3 R4 R5 R6 R8 R9 R10 R11 R13 R14 R15 R16 R17 R18 R19 R20 R21 R22 R23 R24 R25 R26 R27 R28 R29 R30 R31 R32 R34D R34V R35D R35V R36 R38 R39 R40 RSET1 RSET2: library part CMP-009-00177-2, "SMD Resistor - 0402 (1005 Metric)", Package=0402
G1 G2: library part CMP-023-000000-5, "650V 15A GaN Enhancement mode Transistor", Package=DFN8X8
J1 J3: library part CMP-002-00071-1, "Terminal Block 1X2, 6.35mm pitch"
J2 J14: library part CMP-002-00074-4, "Solderable Connection Pad"
J9 J10 J11 J12 J13 J15 J16 J17 J18 J19 J21 J22 J23 J24 J25 J26 J27 J28 J29 J30 J31 J32 J35: library part CMP-002-00072-1, "Male Pin, 1 Pin"
J20: library part CMP-002-00073-2, "Male Pin 2.54mm pitch 1X2"
J33 J34: library part CMP-025-000000-6, "SMA connector, Vertical, Female", Package=SMA
MH1 MH2 MH3 MH4: library part CMP-032-000006-1
R1: library part CMP-009-00182-3, "SMD Resistor - 2512 (6432 Metric)", Package=2512
R7 R12: library part CMP-009-00180-2, "SMD Resistor - 1206 (3216 Metric)", Package=1206
R33D R33V: library part CMP-009-00183-1, "SMD Resistor - 2512 (6432) On It's Side", Package=2512
Source1 TP1 TP2 TP7 TP8 TP9 TP10 TP11: library part CMP-001-0000-5, "testpoint for circuit"
U1: library part CMP-019-00050-1, "IC REG LINEAR POS ADJ 1A SOT223", Package=SOT223
U2: library part CMP-05721-000044-1, "IC REG LIN NEG ADJ 200MA SOT23-5"
U3: library part CMP-032-000005-2, "https://www.digikey.ca/en/products/detail/diodes-incorporated/AZ1117IH-5-0TRG1/5699673"
U4: library part CMP-027-000000-12, "WIDEBAND, LOW NOISE, LOW DISTORTION FULLY DIFFERENTIAL AMPLIFIER", Package=QFN3X3
U5: library part CMP-019-000000-5, "DGTL ISO 5KV 1CH GATE DRVR 8SOIC", Package="8-SOIC WIDE"
VR1 VR2: library part CMP-009-00181-2, "Potentiometer, J-Lead Trim Pot"

## Via types
v1: diameter 0.6, hole 0.3, Top Layer to Bottom Layer, tented both sides, 249 vias
v2: diameter 0.6/0.6/0.6/0.6 (per signal layer), hole 0.3, Top Layer to Bottom Layer, tented both sides, 90 vias
v3: diameter 0.6, hole 0.3, Top Layer to Bottom Layer, 12 vias

## Nets (pads, with @x,y where several pads share a name; then routed paths per layer and width w, separated by ;. In a path a pad name is that pad's centre, name@x,y a point inside that pad or via, vN(x,y) a via of type N, cw(c..) or ccw(c..) an arc to the next point about the centre after c; other vN are vias at no path point)
+5: C24.2 C25.2 C34.2 C36.2 C38.2 C39.2 C40.2 TP8.1 U3.2 U3.4 U4.5 U4.6 U4.7 U4.8 U4.12 | length 3.4
  Layer 2 w0.3: v2(32.7,19.5) v2@32.7,19.581
  Bottom Layer w0.6: 32,19.6 32.7,20.3 32.7,22.1 v2(33.1,22.5)
  other v2: 30.862,18.799 32.132,18.799 30.3,19.5 23,20.3 26,20.5 23,21.4 24,21.4 25,21.4 26,21.4
+5_SIG: C20.1 C21.1 C50.1 J10.1 R6.2 R10.2 U5.1 | length 0.9
  Top Layer w0.185: v2(56.8,27.5) R6.2 ; R10.2@56.8,30.699 v2(56.8,31.2)
  other v2: 55.4,26.5 54.6,26.8 53.6,26.9 66.3,31.2 67.3,31.2 68.6,31.2 69.6,31.2
+VIN: C30.1 C31.1 C32.1 C33.2 J21.1 U3.3
GND_SIG: C20.2 C21.2 C50.2 J13.1 J15.1 R5.1 R13.1 U5.4 | length 0.9
  Top Layer w0.3: v1(55.9,27.5) R5.1 ; R13.1@55.9,30.71 v1(55.9,31.2)
  other v1: 69.2,23.6 69.2,24.8 57.6,26.5 52.3,27.3 71.9,27.4 52.3,28.3 52.3,29.3 71.9,29.4 52.3,30.3 52.3,31.3 53.7,32.1 54.7,32.1 66.3,34.3 67.3,34.3 68.6,34.3 69.6,34.3
  other v3: 59.2,27 61.2,27 63.2,27 65.1,27 58.2,32 59.9,32 61.7,32 64.5,32.4
L_+V: C13.1 C14.1 C22.1 C23.1 C46.2 C47.2 C48.2 C49.2 U1.2 U1.4 U5.8 VR1.1
L_+VIN: C11.1 C12.1 C29.1 J19.1 U1.3
L_-V: C18.1 C19.1 C51.1 C52.1 C53.1 C54.1 U2.5 U5.5 VR2.2 VR2.3
L_-VIN: C16.1 C17.1 C37.2 J30.1 R3.2 U2.2
L_Gate: D2.1 FB1.2 G2.4 R11.2 R40.2 TP7.1 | length 1.9
  Top Layer w0.3: TP7.1 39.9,28.6
  Bottom Layer w0.3: v2(39.5,29.4) 39.8,29.4 v2(40.4,29.4)
L_SS: C11.2 C12.2 C13.2 C14.2 C15.2 C16.2 C17.2 C18.2 C19.2 C22.2 C23.2 C26.2 C27.2 C29.2 C37.1 C46.1 C47.1 C48.1 C49.1 C51.2 C52.2 C53.2 C54.2 D3.1 G2.3 J11.1 J18.1 J23.1 J26.1 J29.1 J31.1 R4.2 R11.1 RSET1.1 RSET2.2 TP11.1 U2.1 | length 2.5
  Top Layer w0.4: R4.2 v1(57,39.8)
  Top Layer w0.5: TP11.1@38.1,27.2 37.947,27.353 37.947,27.846 37.9,27.893 37.9,28.673 38.1,28.873 v1(38.1,28.9)
  other v1: 51.7,12.7 45.1,13.1 51.7,13.5 44.9,14.1 45.8,14.1 60.2,14.7 61.1,14.7 45.1,15.1 44.9,16.3 45.7,16.3 45.1,17.6 45,18.6 45.9,18.6 45.1,19.6 45,20.6 45.8,20.6 45.1,21.6 50.7,22.2 45.3,22.6 43,23 45.9,23.1 50.4,23.2 42.3,23.6 44.1,23.6 45.3,23.6 43.1,23.8 41.7,24.1 50.4,24.1 41,24.7 41,25.6 41.8,25.6 41,26.4 46.5,27.3 46.5,28.3 37.5,28.5 37.5,29.3 46.5,29.3 38.1,29.7 37.5,30.1 46.5,30.4 38.1,30.5 41.3,30.8 37.5,30.9 46.5,31.5 41.3,31.6 42.1,31.6 41.3,32.4 41.9,32.8 42.3,33.5 43,34.2 46.1,34.5 47.1,34.5 43.9,35.1 45.1,35.1 46.6,35.2 47.8,35.2 55.5,35.8 57.5,35.8 59.5,35.8 47.2,36.1 47.2,37.1 46.4,37.6 47.2,38.1 52.9,39.4 53.4,40.1 60.4,41
NetC15_1: C15.1 RSET1.2 U1.1 VR1.2 VR1.3 | length 0.2
  Top Layer w0.4: U1.1 U1.1@49.8,20.4
NetC26_1: C26.1 R3.1 R4.1 U2.3
NetC27_1: C27.1 RSET2.1 U2.4 VR2.1 | length 5.8
  Top Layer w0.2: U2.4@51.49,38.224 51.664,38.05 U2.4 ; VR2.1@56.6,41 VR2.1
  Top Layer w0.3: RSET2.1@51.7,40.5 52.2,41 VR2.1@56.6,41
NetC28_2: C28.2 R7.1 | length 1.2
  Top Layer w0.3: R7.1 C28.2
NetC41_2: C41.2 U4.9 | length 1.1
  Top Layer w0.25: U4.9@32.93,20.514 33.23,20.514 33.545,20.199 33.545,20.009 C41.2@33.68,19.874
NetC42_2: C42.2 C43.1 J33.1 R25.2 R27.1 R28.2 | length 15
  Top Layer w0.185: J33.1 27.7,10.4 31.1,13.8 R25.2 ; R27.1@28.38,19.064 28.38,17.564 29.985,15.959 R28.2@31.075,15.959 ; C42.2@30.19,15.064 C43.1@31.07,15.064 ; R25.2@31.075,14.2 31.075,15.059 C43.1@31.07,15.064 ; R28.2@31.08,15.964 R28.2@31.075,15.959 ; C43.1@31.07,15.064 31.075,15.069 R28.2@31.075,15.959
NetC43_2: C43.2 C44.1 J34.1 R28.1 R30.1 R31.2 | length 15
  Top Layer w0.185: R31.2@31.885,14.2 31.885,15.059 C43.2@31.89,15.064 ; R31.2 31.9,13.8 35.3,10.4 J34.1 ; C44.1@32.77,15.064 C43.2@31.89,15.064 ; R30.1@34.58,19.064 34.58,17.564 32.98,15.964 31.88,15.964 31.885,15.959 31.885,15.069 C43.2@31.89,15.064
NetC45_2: C45.2 U4.4 | length 1.1
  Top Layer w0.25: C45.2@29.28,19.874 29.415,20.009 29.415,20.199 29.73,20.514 U4.4@30.03,20.514
NetD1_1: D1.1 R36.2
NetD1_2: D1.2 FB1.1 R38.2 R39.2
NetD2_2: D2.2 D3.2 | length 2.3
  Bottom Layer w0.5: D3.2 41.65,27.3 41.8,27.45 41.8,27.5 42.1,27.8 D2.2
NetG1_2: G1.3 R2.1
NetG1_3: G1.4 R2.2 TP2.1 | length 2.1
  Top Layer w0.3: R2.2 TP2.1@41.5,41.7
NetJ17_1: J17.1 J20.1 R8.1 | length 12.7
  Top Layer w0.185: R8.1 66.56,28.6 J20.1 68.6,25.6 67.1,24.1 J17.1@66.9,24.1
NetJ20_2: J20.2 J22.1 R9.1 | length 15.1
  Top Layer w0.185: R9.1 60.8,29.1 J20.2 71.4,26.3 J22.1
NetR5_2: R5.2 R6.1 R8.2 TP9.1 U5.2 | length 5
  Top Layer w0.185: U5.2@54.081,28.665 U5.2@54.098,28.682 ; U5.2@54.198,28.682 55.882,28.682 R5.2 R6.1 ; R6.1@56.85,28.65 59.15,28.65 R8.2
NetR7_2: R7.2 R12.1 | length 1.6
  Top Layer w0.3: R12.1 R7.2
NetR9_2: R9.2 R10.1 R13.2 TP10.1 U5.3 | length 5
  Top Layer w0.185: U5.3@54.1,29.9 U5.3@54.117,29.917 ; U5.3@54.217,29.917 55.882,29.917 R13.2 R10.1 R9.2
NetR24_1: R24.1 R27.2 U4.3 | length 2.4
  Top Layer w0.185: R27.2@28.38,19.864 28.38,20.264 R24.1@28.98,20.864
  Top Layer w0.25: R24.1@28.98,20.864 29.13,21.014 U4.3@30.03,21.014
NetR24_2: R24.2 R26.1 U4.2 | length 2.1
  Top Layer w0.185: R26.1 28.98,22.58 28.98,21.664 29.13,21.514 U4.2@30.03,21.514
NetR29_1: R29.1 R32.2 U4.11 | length 2.1
  Top Layer w0.185: U4.11@32.93,21.514 33.83,21.514 33.98,21.664 34.08,21.764 34.08,22.58 R29.1
NetR30_2: R30.2 R32.1 U4.10 | length 2.4
  Top Layer w0.185: R32.1@33.98,20.864 34.58,20.264 R30.2@34.58,19.864
  Top Layer w0.25: U4.10@32.93,21.014 33.83,21.014 R32.1@33.98,20.864
NetR33D_2: R33D.2 R34D.2 R35D.2 | length 2
  Top Layer w0.185: R33D.2@47.8,46.8 R33D.2@48.1,47.1
  Top Layer w0.3: R33D.2@48.1,47.1 R34D.2 R35D.2
NetR33V_2: R33V.2 R34V.2 R35V.2 | length 2.1
  Top Layer w0.3: R33V.2 62.55,53.8 R34V.2 R35V.2
NetR36_1: R36.1 R38.1 R39.1 U5.7
NetR40_1: R40.1 U5.6
PGND: C1.2 C2.2 C3.2 C4.2 C5.2 C6.2 C7.2 C8.2 C9.2 C10.2 C24.1 C25.1 C30.2 C31.2 C32.2 C33.1 C34.1 C36.1 C38.1 C39.1 C40.1 C41.1 C42.1 C44.2 C45.1 J3.1 J3.2 J9.1 J12.1 J16.1 J24.1 J25.1 J27.1 J28.1 J32.1 J33.2 J33.3 J33.4 J33.5 J34.2 J34.3 J34.4 J34.5 J35.1 R1.2 R12.2 R14.1 R15.1 R16.1 R17.1 R18.1 R19.1 R20.1 R21.1 R22.1 R23.1 R25.1 R29.2 R31.1 R34D.1 R34V.1 R35D.1 R35V.1 U3.1 U4.13 U4.14 U4.15 U4.16 U4.17 U4.18 U4.19 U4.20 U4.21 | length 6.7
  Top Layer w0.185: v1(29.3,18.6) C45.1@29.3,19.1 ; R20.1@32.219,26.919 R20.1 32.1,27.2 31.908,27.2 31.8,27.092 31.8,25.1 33.2,23.7 33.8,23.7 33.908,23.592 R29.2 ; v1(33.7,18.6) C41.1
  other v1: 13.7,4 17,4 13.7,5.7 15.4,5.7 17,5.7 23.1,11.2 16.3,11.8 16.3,12.7 23.1,13.2 16.3,13.7 29.98,14.164 32.98,14.164 15.5,14.2 22.3,14.2 29.28,14.364 33.68,14.364 29.08,15.064 33.88,15.064 29.68,17.564 30.88,17.564 32.08,17.564 33.28,17.564 23,17.7 24,17.7 25,17.7 26,18.4 23,18.6 21.9,19 22.3,22.4 24.7,22.5 30.718,23.55 31.5,23.55 32.242,23.55 27.6,25.2 28.4,25.2 29.2,25.2 33.9,25.2 34.7,25.2 35.5,25.2 27.2,25.9 28,25.9 28.8,25.9 29.6,25.9 30.4,25.9 32.7,25.9 33.5,25.9 34.3,25.9 35.1,25.9 35.9,25.9 26.8,26.6 27.6,26.6 28.4,26.6 29.2,26.6 30,26.6 30.8,26.6 32.3,26.6 33.1,26.6 33.9,26.6 34.7,26.6 35.5,26.6 36.3,26.6 26.8,27.4 36.3,27.4 24.3,30 25.2,30 26.1,30 50.6,47.9 52.7,48.3 55.5,48.3 58.5,48.3 61.5,48.3 48.8,48.7 49.7,48.7 50.6,48.7 57,49.6 59.9,49.6 63,49.6 61.5,50.9 62.4,55.4 63.3,55.4 64.2,55.4 65.1,55.4 14.5,60.4 15.5,60.4 16.5,60.4 17.5,60.4 18.7,60.4 19.7,60.4 20.7,60.4 21.7,60.4 22.9,60.4 23.9,60.4 24.9,60.4 25.9,60.4 27.1,60.4 28.1,60.4 29.1,60.4 30.1,60.4 31.3,60.4 32.3,60.4 33.3,60.4 34.3,60.4 35.5,60.4 36.5,60.4 37.5,60.4 38.5,60.4 39.7,60.4 40.7,60.4 41.7,60.4 42.7,60.4 43.9,60.4 44.9,60.4 45.9,60.4 46.9,60.4 48.1,60.4 49.1,60.4 50.1,60.4 51.1,60.4 52.3,60.4 53.3,60.4 54.3,60.4 55.3,60.4 15,61.1 16,61.1 17,61.1 18.1,61.1 19.2,61.1 20.2,61.1 21.2,61.1 22.3,61.1 23.4,61.1 24.4,61.1 25.4,61.1 26.5,61.1 27.6,61.1 28.6,61.1 29.6,61.1 30.7,61.1 31.8,61.1 32.8,61.1 33.8,61.1 34.9,61.1 36,61.1 37,61.1 38,61.1 39.1,61.1 40.2,61.1 41.2,61.1 42.2,61.1 43.3,61.1 44.4,61.1 45.4,61.1 46.4,61.1 47.5,61.1 48.6,61.1 49.6,61.1 50.6,61.1 51.7,61.1 52.8,61.1 53.8,61.1 54.8,61.1
  other v2: 18,3 24,3 27,3 30,3 33,3 36,3 39,3 24,15 39,15 37.5,18 15,21 36,21 39,21 16.5,24 19.5,24 22.5,24 15,27 18,27 21,27 24,27 16.5,30 19.5,30 22.5,30 15,33 18,33 21,33 16.5,36 19.5,36 15,39 18,39 21,39 16.5,42 19.5,42 15,45 18,45 63,57 66,57 58.5,60 61.5,60 64.5,60 15,63 18,63 21,63 24,63 27,63 30,63 33,63 39,63 42,63 45,63 48,63 51,63 54,63 57,63 60,63 63,63 16.5,66 22.5,66 31.5,66 34.5,66 37.5,66 40.5,66 43.5,66 46.5,66 49.5,66 52.5,66 55.5,66 58.5,66
  other v3: 45.6,42.1 48.2,44.3 47.3,45.5 49.4,45.5
Source: G2.1 G2.2 G2.9 R14.2 R15.2 R16.2 R17.2 R18.2 R19.2 R20.2 R21.2 R22.2 R23.2 R26.2 Source1.1 | length 5.4
  Top Layer w0.185: R26.2 29.3,23.7 29.7,23.7 31.4,25.4 31.4,27.6
SW_NODE: C28.1 G1.1 G1.2 G1.9 G2.5 G2.6 G2.7 G2.8 J14.1 R33D.1 TP1.1
VBUS: C1.1 C2.1 C3.1 C4.1 C5.1 C6.1 C7.1 C8.1 C9.1 C10.1 G1.5 G1.6 G1.7 G1.8 J1.1 J1.2 J2.1 R1.1 R33V.1 | length 2.9
  Bottom Layer w0.5: J1.1 9.768,58.657 10.693,58.657 R1.1
pads on no net: MH1.1 MH2.1 MH3.1 MH4.1 U4.1

## Polygon pours and split planes (outlines as drawn)
PGND on Top Layer "NONET_L-01_P-001" (solid, pour order 237): 55.8,61.1 55.3,61.6 30.6,61.6 28.7,63.5 28.7,66.6 27.2,68.1 17.2,68.1 14.4,65.3 14.4,59.6 14.6,59.4 55.351,59.351 55.8,59.8
L_-V on Top Layer (solid, pour order 267): 54.4,41.4 55.6,42.6 57.6,42.6 57.6,44 53.3,44 52.4,43.1 49.2,39.9 49.2,35.3 48.8,34.9 47.5,33.6 43.5,33.6 42.8,32.9 42.8,31.325 43.225,30.9 45.5,30.9 45.6,31 45.6,31.5 46.7,32.6 48.4,32.6 51.2,35.4 51.9,35.4 52.5,36 52.5,36.3 52.3,36.5 52.1,36.5 50.7,37.9 50.7,40.1 52,41.4
NetC27_1 on Top Layer "NONET_L-01_P-001" (solid, pour order 265): 51.2,40.2 51.5,40.5 51.9,40.5 51.9,39.8 51.8,39.7 51.8,38.8 52.3,38.3 52.3,37.8 51.1,37.8 51.1,38.3 51.2,38.4
NetC15_1 on Top Layer "NONET_L-01_P-001" (solid, pour order 264): 60.9,15.8 61.4,16.3 61.4,20.5 60.3,21.6 49.9,21.6 49.7,21.8 49.7,22.5 49.1,22.5 48.8,22.2 48.8,20 49,19.8 50.3,19.8 50.6,20.1 59.6,20.1 60.1,19.6 60,19.5 60,16.3 60.5,15.8
L_SS on Top Layer (solid, pour order 263): 37.7,27.6 38.4,26.9 44.6,20.7 44.6,12.4 46.2,12.4 46.2,24.1 45.9,24.4 43.6,24.4 43.4,24.2 42.3,24.2 42.1,24.4 42.1,26.7 39.5,26.7 38.9,27.3 38.9,29.1 38.7,29.3 38.7,31 38.5,31.2 37.4,31.2 37.2,31 37.2,28.1
NetR36_1 on Top Layer "NONET_L-01_P-001" (solid, pour order 258): 45.156,28.956 45.156,28.374 44.083,28.374 43.025,27.316 43.025,27.075 42.575,27.075 42.575,29.325 43.714,29.325 44.083,28.956
L_+V on Top Layer "NONET_L-01_P-001" (solid, pour order 215): 47.1,22.6 46.7,23 46.7,24.3 46.1,24.9 44.6,24.9 43.7,24.9 43.3,24.5 42.6,24.5 42.5,24.6 42.5,26.6 42.6,26.7 43.1,26.7 43.7,27.3 43.7,27.5 43.9,27.7 45.3,27.7 45.5,27.5 45.5,27 46.8,25.7 48,25.7 48.2,25.5 48.2,19.4 52.2,19.4 52.5,19.7 58.8,19.7 59.2,19.3 59.2,17 58.7,16.5 56.7,16.5 52.6,16.5 52.2,16.9 48.3,16.9 47.1,16.9
L_SS on Top Layer (solid, pour order 262): 43.6,34.1 43.721,34.1 47.2,34.1 48.3,35.2 48.3,39.1 47.3,39.1 46.7,38.5 45.5,37.3 43.5,35.3 42.1,33.9 41.5,33.3 41.5,32.9 41.1,32.5 41.1,30.6 42.3,30.6 42.3,32.8
NetD1_1 on Top Layer "NONET_L-01_P-001" (solid, pour order 260): 42.225,27.525 42.102,27.648 40.844,27.648 40.844,27.254 41.023,27.075 42.225,27.075
NetD1_2 on Top Layer "NONET_L-01_P-001" (solid, pour order 259): 42.225,29.325 41.775,29.325 41.025,29.325 40.844,29.144 40.844,27.952 41.556,27.952 42.225,27.952
NetR40_1 on Top Layer "NONET_L-01_P-001" (solid, pour order 257): 42.575,30.225 42.576,30.226 45.156,30.226 45.156,29.644 42.706,29.644 42.575,29.775
L_Gate on Top Layer "NONET_L-01_P-001" (solid, pour order 256): 40.675,30.525 40.975,30.225 42.2,30.225 42.2,29.775 40.975,29.775 40.6,29.4 40.6,28.5 40.2,28.1 39.7,28.1 39.325,28.475 39.325,30.625 39.4,30.7 40.675,30.7
VBUS on Top Layer "VBUS_L01_P200" (solid, pour order 200): 55.3,56 55.7,55.6 55.7,54.3 55.8,54.2 56,54 57,54 57,53 55.2,53 54.3,52.1 43.2,52.1 41.3,50.2 4.9,50.2 2.8,52.3 2.8,59.5 4.7,61.4 10.5,61.4 10.9,61 10.9,58 12.9,56
+5_SIG on Top Layer "NONET_L-01_P-001" (solid, pour order 58): 72.3,31.9 71.8,32.4 66.1,32.4 65.8,32.1 65.8,30.8 66,30.6 71.9,30.6 72.3,31
PGND on Top Layer "NONET_L-01_P-001" (solid, pour order 245): 23.9,29.8 24.1,29.6 26.3,29.6 26.5,29.8 26.5,30.2 26.1,30.6 26.1,31.6 24.3,31.6 24.3,30.6 23.9,30.2
PGND on Top Layer "NONET_L-01_P-001" (solid, pour order 236): 65.3,55 64.8,55 64.6,54.8 64.6,54.5 64.5,54.4 63,54.4 62.9,54.5 62.9,54.8 62.7,55 62.2,55 62,55.2 62,55.6 62.2,55.8 65.3,55.8 65.5,55.6 65.5,55.2
PGND on Top Layer "NONET_L-01_P-001" (solid, pour order 235): 50.3,47.7 50.4,47.6 50.8,47.6 51,47.8 51,48.8 50.8,49 48.6,49 48.4,48.8 48.4,47.9 48.6,47.7
PGND on Top Layer "NONET_L-01_P-001" (solid, pour order 234): 22.7,18.8 22.7,17.5 22.9,17.3 25.5,17.3 26.4,18.2 26.4,19.3 25.8,19.3 25.5,19 22.9,19
PGND on Top Layer "NONET_L-01_P-001" (solid, pour order 233): 21.8,10.5 21.8,14.2 22.2,14.6 22.5,14.6 23.5,13.6 23.5,11 23,10.5
+5 on Top Layer "NONET_L-01_P-001" (solid, pour order 232): 32.8,22.5 32.8,22.1 32.9,22 33.3,22 33.3,22.1 33.4,22.2 33.4,22.5
+5 on Top Layer "NONET_L-01_P-001" (solid, pour order 231): 22.7,21.8 22.8,21.9 22.8,22.5 24.2,22.5 24.2,21.9 24.3,21.8 26.2,21.8 26.5,21.5 26.5,19.7 26.4,19.6 25.5,19.6 25.2,19.9 20.2,19.9 19.4,19.1 19.4,17.7 18.3,16.6 18.3,14.5 17.3,14.5 17.3,16.6 16.2,17.7 16.2,22.4 19.4,22.4 20,21.8
PGND on Top Layer "NONET_L-01_P-001" (solid, pour order 230): 15,12.3 15,16.6 16,16.6 16,15.2 17.1,14.1 17.7,13.5 17.7,3.8 16.7,2.8 14.1,2.8 13.2,3.7 13.2,10.5
+VIN on Top Layer "NONET_L-01_P-001" (solid, pour order 229): 18.3,3.8 19.3,2.8 21.7,2.8 22.6,3.7 22.6,8.6 20.9,10.3 20.9,16.3 20.5,16.7 19.5,16.7 19,16.2 19,14.4 18.5,13.9 18.5,11.4 18.3,11.2
GND_SIG on Top Layer "NONET_L-01_P-001" (solid, pour order 249): 72.5,23.5 72,23 66.2,23 63.5,25.7 53.2,25.7 51.9,27 51.9,31.5 52.8,32.4 63.6,32.4 66,34.8 72,34.8 72.5,34.3
L_SS on Top Layer "NONET_L-01_P-001" (solid, pour order 228): 46.7,31.8 46.9,31.6 46.9,27.1 46.7,26.9 46.3,26.9 46.1,27.1 46.1,31.6 46.3,31.8
L_SS on Top Layer "NONET_L-01_P-001" (solid, pour order 227): 62.2,41.9 62.6,42.3 62.6,43.5 62,44.1 58.6,44.1 58.4,43.9 58.4,40.5 60.8,40.5
L_SS on Top Layer "NONET_L-01_P-001" (solid, pour order 226): 53.1,36.5 53.1,35.8 54.4,35.8 54.9,35.3 59.5,35.3 59.8,35.6 59.8,36.1 59.5,36.4 54.7,36.4 54.6,36.5
L_-VIN on Top Layer "NONET_L-01_P-001" (solid, pour order 225): 53.3,37.4 53.1,37.2 53.1,36.9 53.2,36.8 55,36.8 55.4,37.2 61.3,37.2 62.6,38.5 62.6,39.8 62.3,40.1 60.2,40.1 59.8,39.7 58.3,39.7 57.7,39.1 56.2,39.1 56.2,38.5 55.9,38.2 55.4,38.2 55.4,38.1 54.7,37.4
L_SS on Top Layer "NONET_L-01_P-001" (solid, pour order 223): 52.3,39.9 52.1,39.7 52.1,39.2 53.7,39.2 53.7,40.5 52.3,40.5
NetC26_1 on Top Layer "NONET_L-01_P-001" (solid, pour order 224): 53.1,37.9 53.1,38.2 54.1,39.2 54.1,39.6 54.5,39.6 54.9,40 55.8,40 55.8,38.6 55.4,38.6 54.5,37.7 53.3,37.7
L_SS on Top Layer "NONET_L-01_P-001" (solid, pour order 220): 61.3,15.5 59.8,15.5 59.1,16.2 57.9,16.2 57.5,15.8 57.5,14.2 61.3,14.2 61.5,14.4 61.5,15.3
L_+VIN on Top Layer "NONET_L-01_P-001" (solid, pour order 219): 46.3,9.9 45.4,10.8 45.4,11.9 47.1,11.9 47.1,15.8 47.7,16.4 50.4,16.4 50.4,15 49.7,14.3 49.7,10.1 49.5,9.9
L_SS on Top Layer "NONET_L-01_P-001" (solid, pour order 218): 50.6,13.8 50.6,10.1 50.8,9.9 53.5,9.9 53.5,12.7 52.4,13.8
L_SS on Top Layer "NONET_L-01_P-001" (solid, pour order 217): 50.7,22.6 51,22.3 51,22.1 50.8,21.9 50,21.9 50,22.7 49.8,22.9 49.2,22.9 49.2,24.4 50.5,24.4 50.7,24.2
GND_SIG on Top Layer "NONET_L-01_P-001" (solid, pour order 214): 53.3,32.4 53.3,31.1 53.5,30.9 55.3,30.9 55.7,30.5 56.1,30.5 56.1,31.5 55.2,32.4
+5_SIG on Top Layer "NONET_L-01_P-001" (solid, pour order 213): 53.4,27.6 53.4,26.7 54.1,26 56.3,26 56.3,26.9 56.2,27 55.4,27 55,27.4 55,27.6
PGND on Top Layer "NONET_L-01_P-001" (solid, pour order 212): 36.2,26.1 36.6,26.5 36.6,27.5 36.4,27.7 36.2,27.7 35.7,27.2 32.1,27.2 32.1,26.1 32.6,25.6 33.1,25.6 33.8,24.9 35.6,24.9 36.2,25.5
PGND on Top Layer "NONET_L-01_P-001" (solid, pour order 208): 26.9,26.1 26.5,26.5 26.5,27.5 26.7,27.7 26.9,27.7 27.4,27.2 31,27.2 31,26.1 30.5,25.6 30,25.6 29.3,24.9 27.5,24.9 26.9,25.5
NetG1_3 on Top Layer "NONET_L-01_P-001" (solid, pour order 204): 39.4,42.4 39.4,43.1 39.8,43.5 40.5,43.5 40.6,43.4 40.6,42.4 39.7,41.5 39.2,41.5 39.2,42.2
NetG1_2 on Top Layer "NONET_L-01_P-001" (solid, pour order 203): 38.8,42.2 38.6,42.4 38.6,43 38.475,43.125 37.725,43.125 37.5,42.9 37.5,42.3 38.3,41.5 38.8,41.5
SW_NODE on Top Layer "NONET_L-01_P-001" (solid, pour order 202): 24.4,42.6 26.1,42.6 27,41.7 29.1,41.7 33.3,37.5 40.7,37.5 40.7,40.2 39.7,41.2 38,41.2 37,42.2 37,44.1 37.2,44.3 40.7,44.3 40.7,45.1 41.9,46.3 42.5,46.3 42.5,47.3 41.8,47.3 41.2,47.9 33.4,47.9 31.8,46.3 27.1,46.3 26.4,45.6 26.4,43.4 26,43 24.5,43 24.4,42.9
Source on Top Layer "NONET_L-01_P-001" (solid, pour order 201): 35.8,27.6 35.7,27.5 27.4,27.5 27.3,27.6 27.3,29 33.4,35.1 40.5,35.1 40.5,31.9 37.1,31.9 36.8,31.6 36.8,29 35.8,28
+5 on Top Layer "NONET_L-01_P-001" (solid, pour order 66): 33.105,18.414 29.855,18.414 29.855,19.467 30.6,20.212 32.36,20.212 33.105,19.467
PGND on Top Layer "NONET_L-01_P-001" (solid, pour order 118): 33.28,17.164 29.68,17.164 29.48,17.364 29.48,17.764 29.63,17.914 33.33,17.914 33.48,17.764 33.48,17.364
PGND on Top Layer "NONET_L-01_P-001" (solid, pour order 119): 33.48,15.364 33.38,15.264 33.38,14.764 33.08,14.464 32.78,14.464 32.7,14.384 32.7,13.945 32.78,13.864 33.68,13.864 34.18,14.364 34.18,15.264 34.08,15.364
PGND on Top Layer "NONET_L-01_P-001" (solid, pour order 129): 29.48,15.364 29.58,15.264 29.58,14.764 29.88,14.464 30.18,14.464 30.48,14.164 30.18,13.864 29.28,13.864 28.78,14.364 28.78,15.264 28.88,15.364
PGND on Top Layer "PGND_L01_P188" (solid, pour order 188): 30.6,23.9 30.4,23.7 30.4,22.4 30.5,22.3 32.5,22.3 32.6,22.4 32.6,23.7 32.4,23.9
PGND on Layer 1 "NONET_L-01_P-001" (solid, pour order 268): 13.2,46.5 11,48.7 4.1,48.7 1.5,51.3 1.5,60.6 2.9,62 11.1,62 17.2,68.1 58.9,68.1 67.9,59.1 67.9,53 62.6,47.7 52.5,47.7 41,36.2 41,33 39.9,31.9 37.1,31.9 36.8,31.6 36.8,25.3 39.7,22.4 39.7,2.6 38.6,1.5 14.3,1.5 13.2,2.6
L_SS on Layer 1 "L_SS_L02_P246" (solid, pour order 246): 40.6,24.5 42,23.1 44.5,20.6 44.5,11.5 46.3,9.7 53.4,9.7 54,10.3 54,12.8 54.9,13.7 61,13.7 62.1,14.8 62.1,21.6 61.6,22.1 52.9,22.1 49.758,25.242 47.5,27.5 47.5,31.4 49.8,33.743 51.257,35.2 59.7,35.2 62.8,38.3 62.8,43.7 62.2,44.3 53.3,44.3 48.4,39.4 47.1,39.4 41.4,33.7 41.4,32.8 41.3,32.7 39.9,31.3 37.2,31.3 37.2,27.9
GND_SIG on Layer 1 "NONET_L-01_P-001" (solid, pour order 210): 72.5,23.5 72,23 66.2,23 63.5,25.7 53.2,25.7 51.9,27 51.9,31.5 52.8,32.4 63.6,32.4 66,34.8 72,34.8 72.5,34.3
+5 on Bottom Layer "NONET_L-01_P-001" (solid, pour order 240): 17.9,19.8 18.1,19.6 23.6,19.6 23.9,19.9 25.1,19.9 25.4,19.6 26.5,19.6 27,19.1 29.5,19.1 30.1,18.5 32.9,18.5 33.1,18.7 33.1,19.6 32.9,19.8 32.7,19.8 32.3,20.2 30.2,20.2 29.8,20.6 28.2,20.6 26.9,21.9 18.1,21.9 17.9,21.7
PGND on Bottom Layer "Bottom Layer-PGND" (solid, pour order 243): 13.2,2.6 14.3,1.5 38.6,1.5 39.7,2.6 39.7,22.4 36.8,25.3 36.8,31.6 37.1,31.9 39.9,31.9 41,33 41,36.2 52.5,47.7 62.6,47.7 67.9,53 67.9,59.1 58.9,68.1 17.2,68.1 14.4,65.3 14.4,61.298 16.3,59.398 16.3,56.8 13.2,53.7 13.2,50.2
L_SS on Bottom Layer "L_SS_L04_P254" (solid, pour order 254): 40.6,24.5 42,23.1 44.5,20.6 44.5,11.5 46.3,9.7 53.4,9.7 54,10.3 54,12.8 54.9,13.7 61,13.7 62.1,14.8 62.1,21.6 61.6,22.1 52.9,22.1 49.758,25.242 47.5,27.5 47.5,31.4 49.8,33.743 51.257,35.2 59.7,35.2 62.8,38.3 62.8,43.7 62.2,44.3 53.3,44.3 48.4,39.4 47.1,39.4 41.4,33.7 41.4,32.8 41.3,32.7 39.9,31.3 37.2,31.3 37.2,27.9
GND_SIG on Bottom Layer "NONET_L-01_P-001" (solid, pour order 211): 72.5,23.5 72,23 66.2,23 63.5,25.7 53.2,25.7 51.9,27 51.9,31.5 52.8,32.4 63.6,32.4 66,34.8 72,34.8 72.5,34.3
PGND on Layer 2 "NONET_L-01_P-001" (solid, pour order 239): 13.2,46.5 11,48.7 4.1,48.7 1.5,51.3 1.5,60.6 2.9,62 11.1,62 17.2,68.1 58.9,68.1 67.9,59.1 67.9,53 62.6,47.7 52.5,47.7 41,36.2 41,33 39.9,31.9 37.1,31.9 36.8,31.6 36.8,25.3 39.7,22.4 39.7,2.6 38.6,1.5 14.3,1.5 13.2,2.6
L_SS on Layer 2 "L_SS_L03_P253" (solid, pour order 253): 46.9,31.9 47.5,31.3 47.5,27.5 45.3,25.3 39.8,25.3 37.2,27.9 37.2,31.3 40.6,31.3 41.2,31.9
+5_SIG on Layer 2 "NONET_L-01_P-001" (solid, pour order 209): 53.8,31.6 52.8,30.6 52.8,26.8 53.7,25.9 67.3,25.9 72.2,30.8 72.2,31.9 71.7,32.4 65.5,32.4 64.7,31.6
no net on Top Solder "NONET_L-01_P-001" (solid): 23.8,21.9 23.8,21.7 23.9,21.7 23.9,21.9
no net on Top Solder "NONET_L-01_P-001" (solid): 23.1,21.9 23.1,21.6 23.2,21.6 23.2,21.9
no net on Top Solder "NONET_L-01_P-001" (solid): 22.6,22.6 24.4,22.6 24.4,22.3 22.6,22.3

## Other copper
Top Layer:
  pour cut-out: 53.3,27.7 53.1,27.9 53.1,30.3 53.3,30.5 57.4,30.5 57.7,30.8 58.3,30.8 58.7,30.4 60.5,30.4 60.5,28.1 58.6,28.1 58.3,27.8 57.7,27.8 57.4,28.1 55.4,28.1 55,27.7
  pour cut-out: 61.5,54.2 64.6,54.2 64.6,52.8 61.5,52.8
  pour cut-out: 47,47.5 50.1,47.5 50.1,46.1 47,46.1
Layer 1:
  pour cut-out: 37.3,44 38.7,44 38.7,42.2 37.3,42.2
  pour cut-out: 39.3,44 40.7,44 40.7,42.2 39.3,42.2
  pour cut-out: 7.2,61.6 9.9,61.6 10.3,61.2 10.3,58.4 9.9,58 7.2,58 6.8,58.4 6.8,61.2
  pour cut-out: 7.2,55.25 9.9,55.25 10.3,54.85 10.3,52.05 9.9,51.65 7.2,51.65 6.8,52.05 6.8,54.85
  pour cut-out: 61.6,54.1 64.5,54.1 64.5,52.9 61.6,52.9
  pour cut-out: 47.1,47.4 50,47.4 50,46.2 47.1,46.2
  pour cut-out: 29.396,23.393 33.596,23.393 33.596,19.293 29.396,19.293
Layer 2:
  pour cut-out: 7.2,55.25 9.9,55.25 10.3,54.85 10.3,52.05 9.9,51.65 7.2,51.65 6.8,52.05 6.8,54.85
  pour cut-out: 7.2,61.6 9.9,61.6 10.3,61.2 10.3,58.4 9.9,58 7.2,58 6.8,58.4 6.8,61.2
Bottom Layer:
  pour cut-out: 23.7,19.6 23.7,19.1 25.4,19.1 25.7,19.4 26.4,19.4 26.4,19.6

## Silkscreen, mask and mechanical layers (free items; w line width, h text height)
Top Overlay:
  drawing of 29 lines, arcs and shapes, not listed
  text "PGND" at 35.846,68.446 h1.52 r180
  text "VDD" at 64.15,56.234 h0.8 r90
  text "VDS" at 49.25,49.334 h0.8 r90
  text "VDD" at 5.054,47.054 h1.52
  text "- Vadj" at 53.167,45.017 h0.8
  text "SS" at 59.55,44.634 h0.8 r90
  text "SS" at 64.05,42.334 h0.8 r90
  text "Low C probes only / for Vds and Vds" at 70.7,41.56 h0.8 r90
  text "VGate-" at 64.05,36.901 h0.8 r90
  text "SGND" at 71.75,35.334 h0.8 r90
  text "5V" at 73.65,30.934 h0.8 r90
  text "V-" at 71.15,28.534 h0.8 r90
  text "VS" at 37.65,26.266 h0.8 r270
  text "VG" at 39.55,26.266 h0.8 r270
  text "V+" at 71.05,25.834 h0.8 r90
  text "H" at 0.6,25.474 h25.4
  text "+ Vadj" at 57.467,22.917 h0.8
  text "V+" at 66.234,21.75 h0.8
  text "V-" at 70.734,21.75 h0.8
  text "A" at 4.1,19.095 h10
  text "SS" at 57.834,12.65 h0.8
  text "e" at 11.2,9.695 h10
  text "Low-side DPT 2.0" at 56.036,9.354 h1
  text "VGate+" at 46.301,8.35 h0.8
  text "SS" at 52.134,8.35 h0.8
  text "V-" at 26.95,3.15 h0.8
  text "V+" at 34.75,3.15 h0.8
  text "PGND" at 14.05,1.75 h0.8
  text "7V-8V" at 18.65,1.75 h0.8
  text "ENPH479 - GaN Power 2256 / February 2023 / Adam B,, Ben O., Dave N." at 40.9,1 h1
  text "Ids measurement / 30.9mV/A" at 25.025,0.8 h0.7
Bottom Overlay:
  drawing of 18 lines, arcs and shapes, not listed
Board Shape:
  lines w1: 0,0 75,0 ; 0,0 0,75 ; 0,0 75,0 ; 0,0 0,75 ; 0,75 75,75 ; 0,75 75,75 ; 75,0 75,75 ; 75,0 75,75
  lines w1.2: 0,0 0,75 75,75 75,0 0,0

## Text inside footprints (layer, text, board x,y; h text height)
C32: Top Overlay "+" at 21.908,9.037 h1.5 r180